# EAGLE board SparkFun_MicroMod_Function_Board_Blues_Notecarrier-Panel (EAGLE 9.6.2), part 1 of 3
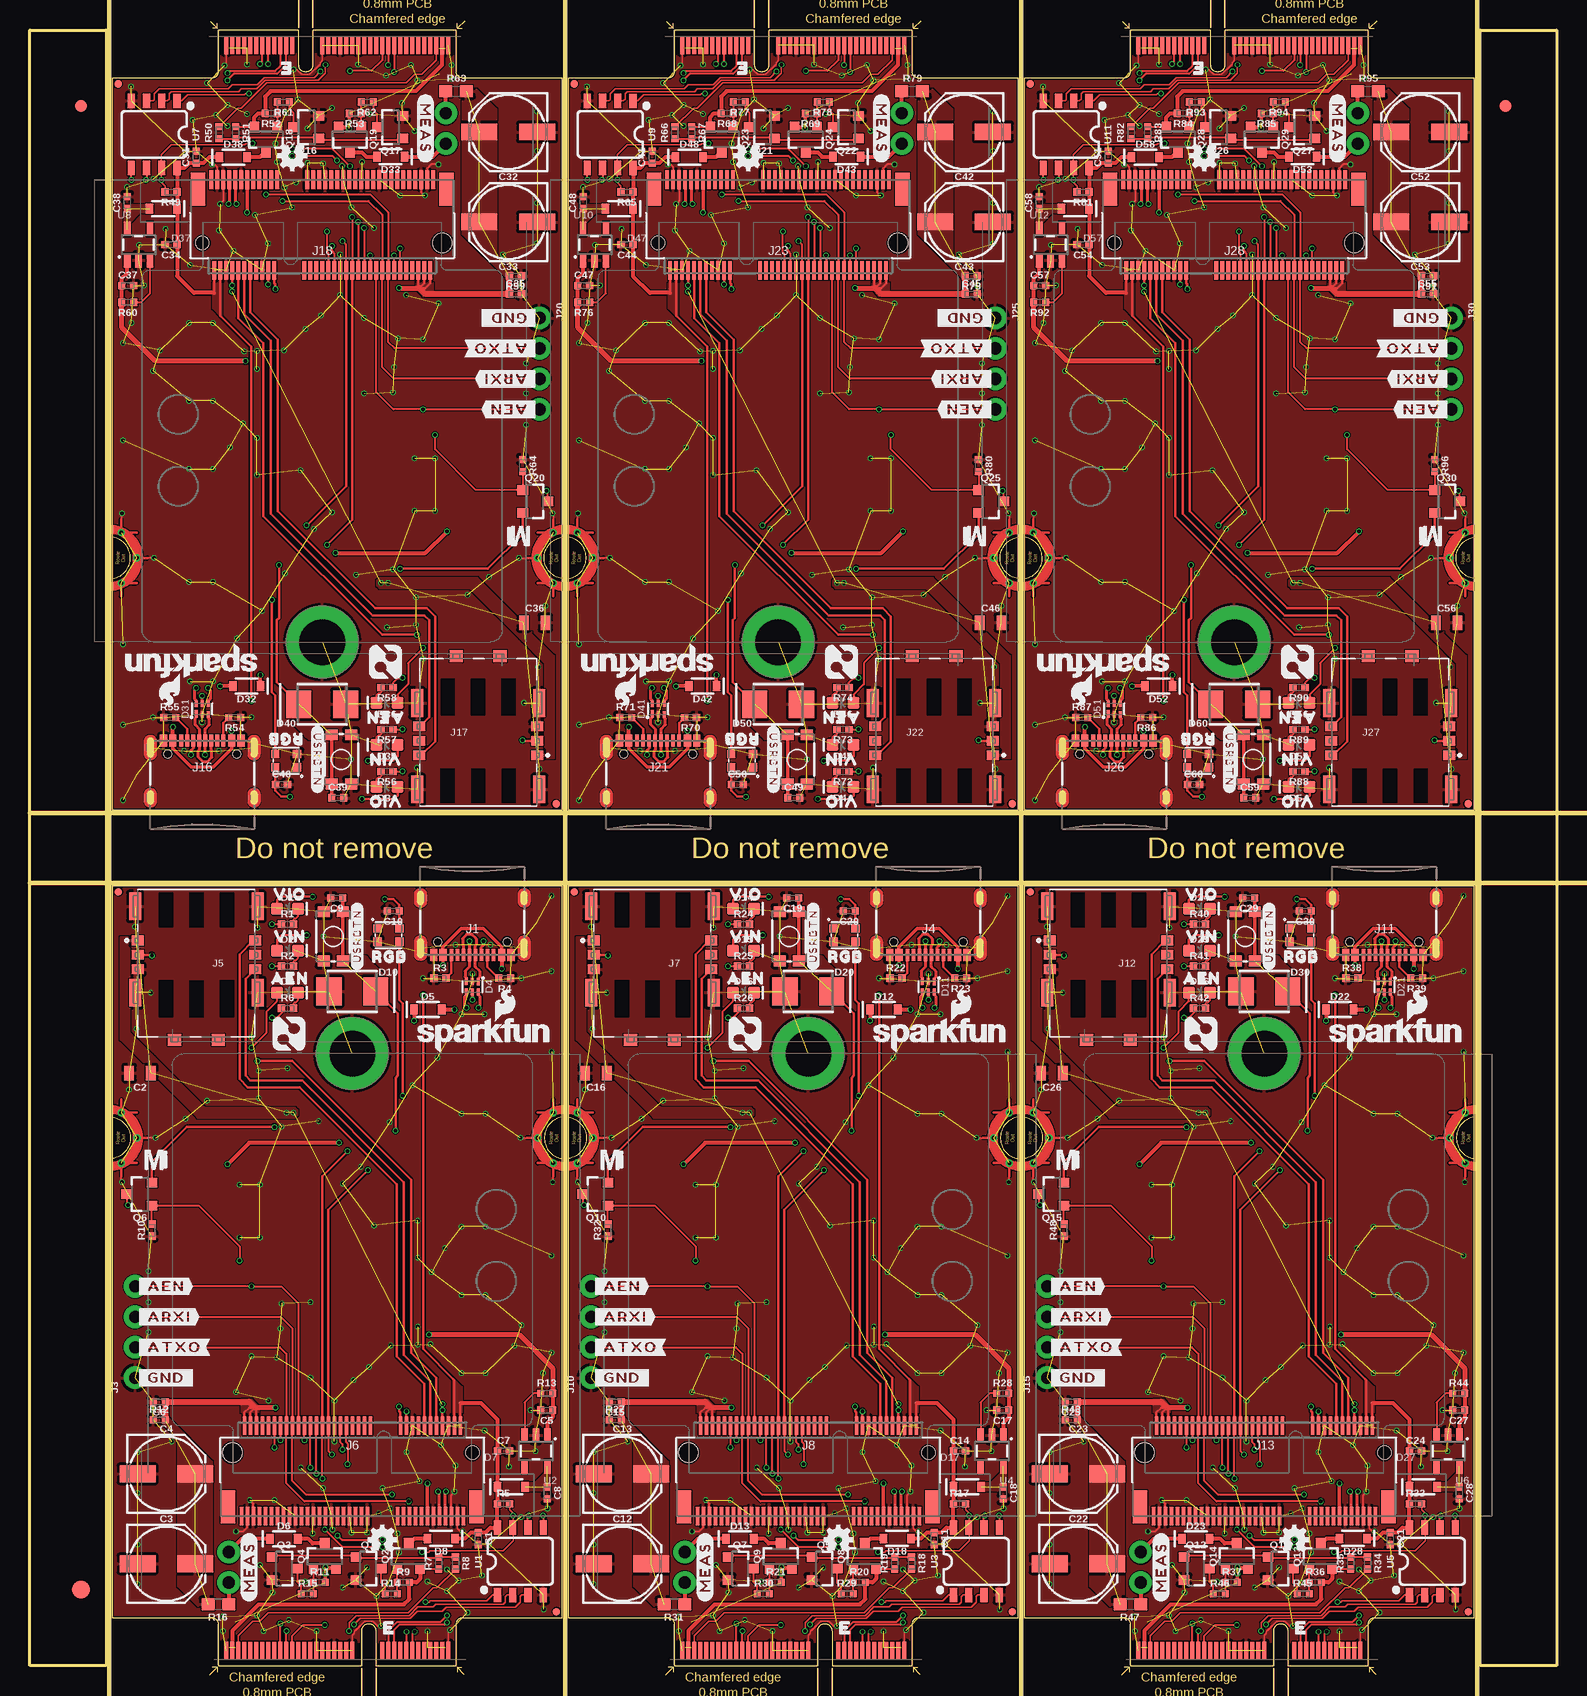
[diagram p0: board, top side]
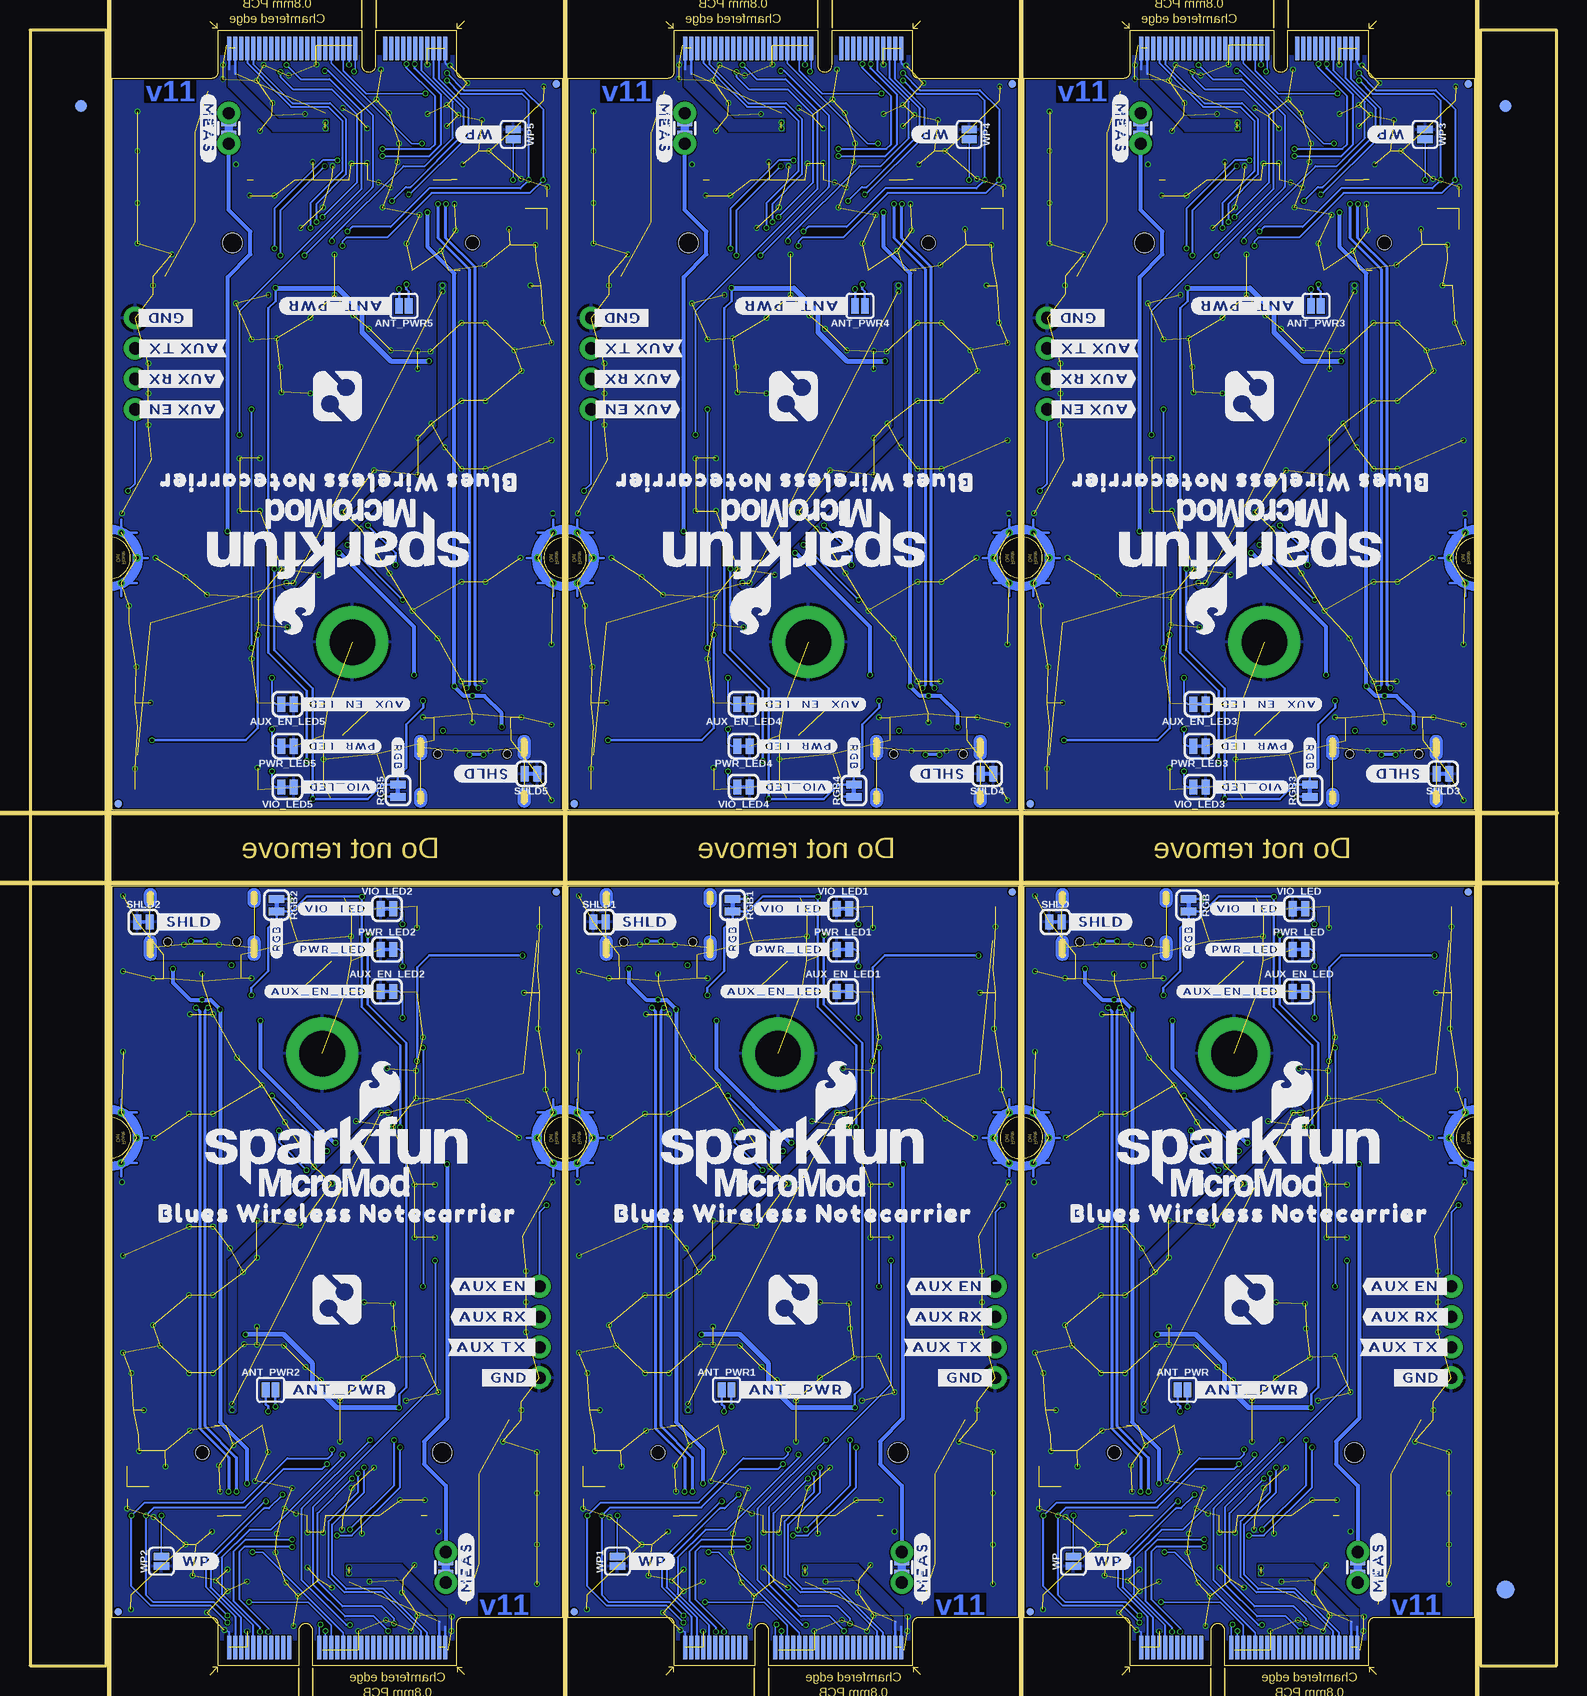
[diagram p1: board, bottom side, seen from below]

Size 127.21 x 136.35 mm. Coordinates in mm from the lower left corner, seen from the top.
Outline: 44.35,4 44.35,65 6.86,65 6.86,4 15.18,4 arc-90 15.68,3.5 15.68,0 27.63,0 27.63,2.9 arc-90 28.23,3.5 28.24,3.5 arc-90 28.83,2.91 28.83,0 35.53,0 35.53,3.51 arc-90 36.03,4 44.35,4
Outline: 82.35,4 82.35,65 44.86,65 44.86,4 53.18,4 arc-90 53.68,3.5 53.68,0 65.63,0 65.63,2.9 arc-90 66.23,3.5 66.24,3.5 arc-90 66.83,2.91 66.83,0 73.53,0 73.53,3.51 arc-90 74.03,4 82.35,4
Outline: 120.35,4 120.35,65 82.86,65 82.86,4 91.18,4 arc-90 91.68,3.5 91.68,0 103.63,0 103.63,2.9 arc-90 104.23,3.5 104.24,3.5 arc-90 104.83,2.91 104.83,0 111.53,0 111.53,3.51 arc-90 112.03,4 120.35,4
Outline: 6.86,132.35 6.86,71.35 44.35,71.35 44.35,132.35 36.03,132.35 arc-90 35.53,132.85 35.53,136.35 23.58,136.35 23.58,133.45 arc-90 22.98,132.85 22.97,132.85 arc-90 22.38,133.44 22.38,136.35 15.68,136.35 15.68,132.84 arc-90 15.18,132.35 6.86,132.35
Outline: 44.86,132.35 44.86,71.35 82.35,71.35 82.35,132.35 74.03,132.35 arc-90 73.53,132.85 73.53,136.35 61.58,136.35 61.58,133.45 arc-90 60.98,132.85 60.97,132.85 arc-90 60.38,133.44 60.38,136.35 53.68,136.35 53.68,132.84 arc-90 53.18,132.35 44.86,132.35
Outline: 82.86,132.35 82.86,71.35 120.35,71.35 120.35,132.35 112.03,132.35 arc-90 111.53,132.85 111.53,136.35 99.58,136.35 99.58,133.45 arc-90 98.98,132.85 98.97,132.85 arc-90 98.38,133.44 98.38,136.35 91.68,136.35 91.68,132.84 arc-90 91.18,132.35 82.86,132.35
Outline: 120.86,136.35 127.21,136.35 127.21,0 120.86,0 120.86,136.35
Outline: 0,136.35 6.35,136.35 6.35,0 0,0 0,136.35
Copper layers (1*16): Top 0.035mm / dielectric 0.8mm / Bottom 0.035mm
Design rules "SparkFun_MicroMod_Function_Board_Blues_Notecarrier": minimum track width 4mil, minimum drill 0.2mm, track to track 4mil, track to pad 4mil, pad to pad 4mil, via to via 4mil, smd to smd 4mil, copper to edge 6mil, drill to drill 6mil, minimum pad ring 3mil, minimum via ring 3mil, stop-mask expansion 2.5mil, vias tented up to drill 25mil, thermal gap 10mil
Net classes: 1 USB_DIFF: width 0.25 mm, clearance 0.2 mm; 4 GND: clearance 0.15 mm to class 0
tRestrict: area 18.3,12.2 to 18.4,12.7; area 35.3,12.3 to 35.4,12.7; area 56.3,12.2 to 56.4,12.7; area 73.3,12.3 to 73.4,12.7; area 94.3,12.2 to 94.4,12.7; area 111.3,12.3 to 111.4,12.7; area 32.8,123.7 to 32.9,124.2; area 15.8,123.7 to 15.9,124.1; area 70.8,123.7 to 70.9,124.2; area 53.8,123.7 to 53.9,124.1; area 108.8,123.7 to 108.9,124.2; area 91.8,123.7 to 91.9,124.1
Milling: 6 lines

## Footprints (pad centres in the part's own frame; a part is rotated, then mirrored left to right if it is on the bottom)
SMT-JUMPER_2_NO_SILK = smd 0.635 x 1.27: 1 -0.406,0; 2 0.406,0
SMT-JUMPER_2_NC_TRACE_SILK = smd 0.66 x 1.27: 1 -0.521,0; 2 0.521,0
0402-TIGHT = smd 0.6 x 0.6: 1 -0.5,0; 2 0.5,0
0805 = smd 0.8 x 1.2: 1 -0.9,0; 2 0.9,0
PANASONIC_D = smd 3 x 1.4: + 2.4,0; - -2.4,0
LED-0603 = smd 1 x 1: A -0.877,0; C 0.877,0
SOT886 = smd 0.61 x 0.25: 1 -0.405,0.5 | smd 0.56 x 0.25: 2 -0.43,0; 3 -0.43,-0.5; 4 0.43,-0.5; 5 0.43,0; 6 0.43,0.5
SOD-323 = smd 0.63 x 0.83: A 1.15,0; C -1.15,0
DO-214AA = smd 2.1 x 2.3: A -1.95,0; C 1.95,0
WS2812-2020 = smd 0.7 x 0.7: DI -0.915,0.55; DO 0.915,-0.55; GND 0.915,0.55; VCC -0.915,-0.55
FIDUCIAL-1X2 = smd 1 x 1: 1 0,0
FIDUCIAL-1.5X3 = smd 1.5 x 1.5: 1 0,0
FIDUCIAL-MICRO = smd 0.635 x 0.635: 1 0,0
STAND-OFF-REFLOW-M2.5 = drill 3.8 pad 6: 1 0,0
USB-C-16P-2LAYER-PADS = smd 0.3 x 1: A5 -1.25,-0.34; A6 -0.25,-0.34; A7 0.25,-0.34; A8 1.25,-0.34; B5 1.75,-0.34; B6 0.75,-0.34; B7 -0.75,-0.34; B8 -1.75,-0.34 | smd 0.6 x 1: GND -3.225,-0.34; GND2 3.225,-0.34; VBUS1 -2.45,-0.34; VBUS2 2.45,-0.34 | drill 0.4 pad 0.6 long: SHLD1 -4.318,-0.915; SHLD2 4.318,-0.915; SHLD3 -4.318,-5.095; SHLD4 4.318,-5.095 | hole 0.65: -2.89,-1.445; 2.89,-1.445
M.2-CARD-E-22_FUNCTION_STANDARD = smd 0.35 x 1.45: 1 9.25,1.275; 3 8.75,1.275; 5 8.25,1.275; 7 7.75,1.275; 9 7.25,1.275; 11 6.75,1.275; 13 6.25,1.275; 15 5.75,1.275; 17 5.25,1.275; 19 4.75,1.275; 21 4.25,1.275; 23 3.75,1.275; 33 1.25,1.275; 35 0.75,1.275; 37 0.25,1.275; 39 -0.25,1.275; 41 -0.75,1.275; 43 -1.25,1.275; 45 -1.75,1.275; 47 -2.25,1.275; 49 -2.75,1.275; 51 -3.25,1.275; 53 -3.75,1.275; 55 -4.25,1.275; 57 -4.75,1.275; 59 -5.25,1.275; 61 -5.75,1.275; 63 -6.25,1.275; 65 -6.75,1.275; 67 -7.25,1.275; 69 -7.75,1.275; 71 -8.25,1.275; 73 -8.75,1.275; 75 -9.25,1.275 | smd 0.35 x 1.95 bottom: 2 9,1.525; 4 8.5,1.525; 6 8,1.525; 8 7.5,1.525; 10 7,1.525; 12 6.5,1.525; 14 6,1.525; 16 5.5,1.525; 18 5,1.525; 20 4.5,1.525; 22 4,1.525; 32 1.5,1.525; 34 1,1.525; 36 0.5,1.525; 38 0,1.525; 40 -0.5,1.525; 42 -1,1.525; 44 -1.5,1.525; 46 -2,1.525; 48 -2.5,1.525; 50 -3,1.525; 52 -3.5,1.525; 54 -4,1.525; 56 -4.5,1.525; 58 -5,1.525; 60 -5.5,1.525; 62 -6,1.525; 64 -6.5,1.525; 66 -7,1.525; 68 -7.5,1.525; 70 -8,1.525; 72 -8.5,1.525; 74 -9,1.525 | drill 0.305 pad 0.61: GND1 -18,41.9; GND2 -16.7,44; GND3 -18,46.1; GND4 18,41.9; GND5 16.7,44; GND6 18,46.1
1X04_NO_SILK = drill 1.016 pad 1.88: 1 0,0; 2 2.54,0; 3 5.08,0; 4 7.62,0
NANO_SIM_MOLEX_104224-0820 = smd 1 x 2.3: G1 -5.1,1.5; G2 -5.1,8.7; G3 5.1,8.7; G4 5.1,1.5 | smd 1.1 x 1: R1 -1.82,12.625; R2 1.82,12.625 | smd 1 x 0.8: S1 4.9,4.35; S2 4.9,5.55; S3 -4.9,4.35; S4 4.9,6.75; S5 -4.9,5.55; S6 -4.9,6.75
M.2-CONNECTOR-E = smd 0.3 x 1.55: 1 9.25,-5.275; 2 9,2.275; 3 8.75,-5.275; 4 8.5,2.275; 5 8.25,-5.275; 6 8,2.275; 7 7.75,-5.275; 8 7.5,2.275; 9 7.25,-5.275; 10 7,2.275; 11 6.75,-5.275; 12 6.5,2.275; 13 6.25,-5.275; 14 6,2.275; 15 5.75,-5.275; 16 5.5,2.275; 17 5.25,-5.275; 18 5,2.275; 19 4.75,-5.275; 20 4.5,2.275; 21 4.25,-5.275; 22 4,2.275; 23 3.75,-5.275; 32 1.5,2.275; 33 1.25,-5.275; 34 1,2.275; 35 0.75,-5.275; 36 0.5,2.275; 37 0.25,-5.275; 38 0,2.275; 39 -0.25,-5.275; 40 -0.5,2.275; 41 -0.75,-5.275; 42 -1,2.275; 43 -1.25,-5.275; 44 -1.5,2.275; 45 -1.75,-5.275; 46 -2,2.275; 47 -2.25,-5.275; 48 -2.5,2.275; 49 -2.75,-5.275; 50 -3,2.275; 51 -3.25,-5.275; 52 -3.5,2.275; 53 -3.75,-5.275; 54 -4,2.275; 55 -4.25,-5.275; 56 -4.5,2.275; 57 -4.75,-5.275; 58 -5,2.275; 59 -5.25,-5.275; 60 -5.5,2.275; 61 -5.75,-5.275; 62 -6,2.275; 63 -6.25,-5.275; 64 -6.5,2.275; 65 -6.75,-5.275; 66 -7,2.275; 67 -7.25,-5.275; 68 -7.5,2.275; 69 -7.75,-5.275; 70 -8,2.275; 71 -8.25,-5.275; 72 -8.5,2.275; 73 -8.75,-5.275; 74 -9,2.275; 75 -9.25,-5.275 | smd 1.2 x 2.75: A1 10.35,-4.5; A2 -10.35,-4.5 | hole 1.1: 10,0 | hole 1.6: -10,0
COMBO-JUMPER_2_NC_TRACE = smd 0.635 x 1.27: 1 -0.508,0; 2 0.508,0 | drill 1.016 pad 1.88: 3 -1.27,0; 4 1.27,0
SOT23-3 = smd 0.8 x 0.9: 1 -0.95,-1; 2 0.95,-1; 3 0,1.1
0603 = smd 1.1 x 1: 1 -0.85,0; 2 0.85,0
TACTILE_SWITCH_SMD_4.6X2.8MM = smd 0.9 x 1: 1 -2.05,-0.8; 2 2.05,-0.8; 3 2.05,0.8; 4 -2.05,0.8
SO08 = smd 0.6 x 1.2: 1 -1.905,-2.8; 2 -0.635,-2.8; 3 0.635,-2.8; 4 1.905,-2.8; 5 1.905,2.8; 6 0.635,2.8; 7 -0.635,2.8; 8 -1.905,2.8
SOT23-5 = smd 0.55 x 1.2: 1 -0.95,-1.3; 2 0,-1.3; 3 0.95,-1.3; 4 0.95,1.3; 5 -0.95,1.3

## Placement (x,y rotation side)
ANT_PWR  JUMPER-SMT_2_NO_SILK  [SMT-JUMPER_2_NO_SILK]  31.16,23 0 bottom
ANT_PWR1  JUMPER-SMT_2_NO_SILK  [SMT-JUMPER_2_NO_SILK]  69.16,23 0 bottom
ANT_PWR2  JUMPER-SMT_2_NO_SILK  [SMT-JUMPER_2_NO_SILK]  107.16,23 0 bottom
ANT_PWR3  JUMPER-SMT_2_NO_SILK  [SMT-JUMPER_2_NO_SILK]  20.05,113.35 180 bottom
ANT_PWR4  JUMPER-SMT_2_NO_SILK  [SMT-JUMPER_2_NO_SILK]  58.05,113.35 180 bottom
ANT_PWR5  JUMPER-SMT_2_NO_SILK  [SMT-JUMPER_2_NO_SILK]  96.05,113.35 180 bottom
AUX_EN_LED  JUMPER-SMT_2_NC_TRACE_SILK  [SMT-JUMPER_2_NC_TRACE_SILK]  21.46,56.2 0 bottom
AUX_EN_LED1  JUMPER-SMT_2_NC_TRACE_SILK  [SMT-JUMPER_2_NC_TRACE_SILK]  59.46,56.2 0 bottom
AUX_EN_LED2  JUMPER-SMT_2_NC_TRACE_SILK  [SMT-JUMPER_2_NC_TRACE_SILK]  97.46,56.2 0 bottom
AUX_EN_LED3  JUMPER-SMT_2_NC_TRACE_SILK  [SMT-JUMPER_2_NC_TRACE_SILK]  29.75,80.15 180 bottom
AUX_EN_LED4  JUMPER-SMT_2_NC_TRACE_SILK  [SMT-JUMPER_2_NC_TRACE_SILK]  67.75,80.15 180 bottom
AUX_EN_LED5  JUMPER-SMT_2_NC_TRACE_SILK  [SMT-JUMPER_2_NC_TRACE_SILK]  105.75,80.15 180 bottom
C1  0.1uF  [0402-TIGHT]  37.36,10.6 270 top
C2  10uF  [0805]  9.16,49.4 180 top
C3  100uF  [PANASONIC_D]  11.36,8.5 0 top
C4  100uF  [PANASONIC_D]  11.36,16 0 top
C5  0.1uF  [0402-TIGHT]  43.06,21.3 180 top
C6  0.1uF  [0402-TIGHT]  10.76,22 180 top
C7  0.1uF  [0402-TIGHT]  39.46,17.9 0 top
C8  1.0uF  [0402-TIGHT]  43.11,14.4 270 top
C9  1.0uF  [0402-TIGHT]  25.56,64 180 top
C10  0.1uF  [0402-TIGHT]  30.26,62.9 180 top
C11  0.1uF  [0402-TIGHT]  75.36,10.6 270 top
C12  100uF  [PANASONIC_D]  49.36,8.5 0 top
C13  100uF  [PANASONIC_D]  49.36,16 0 top
C14  0.1uF  [0402-TIGHT]  77.46,17.9 0 top
C15  0.1uF  [0402-TIGHT]  48.76,22 180 top
C16  10uF  [0805]  47.16,49.4 180 top
C17  0.1uF  [0402-TIGHT]  81.06,21.3 180 top
C18  1.0uF  [0402-TIGHT]  81.11,14.4 270 top
C19  1.0uF  [0402-TIGHT]  63.56,64 180 top
C20  0.1uF  [0402-TIGHT]  68.26,62.9 180 top
C21  0.1uF  [0402-TIGHT]  113.36,10.6 270 top
C22  100uF  [PANASONIC_D]  87.36,8.5 0 top
C23  100uF  [PANASONIC_D]  87.36,16 0 top
C24  0.1uF  [0402-TIGHT]  115.46,17.9 0 top
C25  0.1uF  [0402-TIGHT]  86.76,22 180 top
C26  10uF  [0805]  85.16,49.4 180 top
C27  0.1uF  [0402-TIGHT]  119.06,21.3 180 top
C28  1.0uF  [0402-TIGHT]  119.11,14.4 270 top
C29  1.0uF  [0402-TIGHT]  101.56,64 180 top
C30  0.1uF  [0402-TIGHT]  106.26,62.9 180 top
C31  0.1uF  [0402-TIGHT]  13.85,125.75 90 top
C32  100uF  [PANASONIC_D]  39.85,127.85 180 top
C33  100uF  [PANASONIC_D]  39.85,120.35 180 top
C34  0.1uF  [0402-TIGHT]  11.75,118.45 180 top
C35  0.1uF  [0402-TIGHT]  40.45,114.35 0 top
C36  10uF  [0805]  42.05,86.95 0 top
C37  0.1uF  [0402-TIGHT]  8.15,115.05 0 top
C38  1.0uF  [0402-TIGHT]  8.1,121.95 90 top
C39  1.0uF  [0402-TIGHT]  25.65,72.35 0 top
C40  0.1uF  [0402-TIGHT]  20.95,73.45 0 top
C41  0.1uF  [0402-TIGHT]  51.85,125.75 90 top
C42  100uF  [PANASONIC_D]  77.85,127.85 180 top
C43  100uF  [PANASONIC_D]  77.85,120.35 180 top
C44  0.1uF  [0402-TIGHT]  49.75,118.45 180 top
C45  0.1uF  [0402-TIGHT]  78.45,114.35 0 top
C46  10uF  [0805]  80.05,86.95 0 top
C47  0.1uF  [0402-TIGHT]  46.15,115.05 0 top
C48  1.0uF  [0402-TIGHT]  46.1,121.95 90 top
C49  1.0uF  [0402-TIGHT]  63.65,72.35 0 top
C50  0.1uF  [0402-TIGHT]  58.95,73.45 0 top
C51  0.1uF  [0402-TIGHT]  89.85,125.75 90 top
C52  100uF  [PANASONIC_D]  115.85,127.85 180 top
C53  100uF  [PANASONIC_D]  115.85,120.35 180 top
C54  0.1uF  [0402-TIGHT]  87.75,118.45 180 top
C55  0.1uF  [0402-TIGHT]  116.45,114.35 0 top
C56  10uF  [0805]  118.05,86.95 0 top
C57  0.1uF  [0402-TIGHT]  84.15,115.05 0 top
C58  1.0uF  [0402-TIGHT]  84.1,121.95 90 top
C59  1.0uF  [0402-TIGHT]  101.65,72.35 0 top
C60  0.1uF  [0402-TIGHT]  96.95,73.45 0 top
D1  RED  [LED-0603]  21.46,63.1 0 top
D2  RED  [LED-0603]  21.46,59.6 0 top
D3  BLUE  [LED-0603]  21.46,56.1 0 top
D4  PRTR5V0U2F  [SOT886]  36.86,56.6 270 top
D5  3A/10V/280mV  [SOD-323]  33.16,54.7 0 top
D6  3A/10V/280mV  [SOD-323]  21.16,10.57 0 top
D7  0.5A/40V/420mV  [SOD-323]  40.11,14.9 0 top
D8  0.5A/40V/420mV  [SOD-323]  34.26,10.6 180 top
D9  SMBJP6KE6.8A-TP  [DO-214AA]  26.86,56.2 0 top
D10  WS2812_2020  [WS2812-2020]  29.86,60.9 180 top
D11  PRTR5V0U2F  [SOT886]  74.86,56.6 270 top
D12  3A/10V/280mV  [SOD-323]  71.16,54.7 0 top
D13  3A/10V/280mV  [SOD-323]  59.16,10.57 0 top
D14  RED  [LED-0603]  59.46,63.1 0 top
D15  RED  [LED-0603]  59.46,59.6 0 top
D16  BLUE  [LED-0603]  59.46,56.1 0 top
D17  0.5A/40V/420mV  [SOD-323]  78.11,14.9 0 top
D18  0.5A/40V/420mV  [SOD-323]  72.26,10.6 180 top
D19  SMBJP6KE6.8A-TP  [DO-214AA]  64.86,56.2 0 top
D20  WS2812_2020  [WS2812-2020]  67.86,60.9 180 top
D21  PRTR5V0U2F  [SOT886]  112.86,56.6 270 top
D22  3A/10V/280mV  [SOD-323]  109.16,54.7 0 top
D23  3A/10V/280mV  [SOD-323]  97.16,10.57 0 top
D24  RED  [LED-0603]  97.46,63.1 0 top
D25  RED  [LED-0603]  97.46,59.6 0 top
D26  BLUE  [LED-0603]  97.46,56.1 0 top
D27  0.5A/40V/420mV  [SOD-323]  116.11,14.9 0 top
D28  0.5A/40V/420mV  [SOD-323]  110.26,10.6 180 top
D29  SMBJP6KE6.8A-TP  [DO-214AA]  102.86,56.2 0 top
D30  WS2812_2020  [WS2812-2020]  105.86,60.9 180 top
D31  PRTR5V0U2F  [SOT886]  14.35,79.75 90 top
D32  3A/10V/280mV  [SOD-323]  18.05,81.65 180 top
D33  3A/10V/280mV  [SOD-323]  30.05,125.78 180 top
D34  RED  [LED-0603]  29.75,73.25 180 top
D35  RED  [LED-0603]  29.75,76.75 180 top
D36  BLUE  [LED-0603]  29.75,80.25 180 top
D37  0.5A/40V/420mV  [SOD-323]  11.1,121.45 180 top
D38  0.5A/40V/420mV  [SOD-323]  16.95,125.75 0 top
D39  SMBJP6KE6.8A-TP  [DO-214AA]  24.35,80.15 180 top
D40  WS2812_2020  [WS2812-2020]  21.35,75.45 0 top
D41  PRTR5V0U2F  [SOT886]  52.35,79.75 90 top
D42  3A/10V/280mV  [SOD-323]  56.05,81.65 180 top
D43  3A/10V/280mV  [SOD-323]  68.05,125.78 180 top
D44  RED  [LED-0603]  67.75,73.25 180 top
D45  RED  [LED-0603]  67.75,76.75 180 top
D46  BLUE  [LED-0603]  67.75,80.25 180 top
D47  0.5A/40V/420mV  [SOD-323]  49.1,121.45 180 top
D48  0.5A/40V/420mV  [SOD-323]  54.95,125.75 0 top
D49  SMBJP6KE6.8A-TP  [DO-214AA]  62.35,80.15 180 top
D50  WS2812_2020  [WS2812-2020]  59.35,75.45 0 top
D51  PRTR5V0U2F  [SOT886]  90.35,79.75 90 top
D52  3A/10V/280mV  [SOD-323]  94.05,81.65 180 top
D53  3A/10V/280mV  [SOD-323]  106.05,125.78 180 top
D54  RED  [LED-0603]  105.75,73.25 180 top
D55  RED  [LED-0603]  105.75,76.75 180 top
D56  BLUE  [LED-0603]  105.75,80.25 180 top
D57  0.5A/40V/420mV  [SOD-323]  87.1,121.45 180 top
D58  0.5A/40V/420mV  [SOD-323]  92.95,125.75 0 top
D59  SMBJP6KE6.8A-TP  [DO-214AA]  100.35,80.15 180 top
D60  WS2812_2020  [WS2812-2020]  97.35,75.45 0 top
E$1  [FIDUCIAL-1X2]  4.23,130 0 top
E$2  [FIDUCIAL-1X2]  4.23,130 0 bottom
E$3  [FIDUCIAL-1X2]  122.98,130 0 top
E$4  [FIDUCIAL-1X2]  122.98,130 0 bottom
E$5  [FIDUCIAL-1.5X3]  4.23,6.35 0 top
E$6  [FIDUCIAL-1.5X3]  4.23,6.35 0 bottom
FD1  FIDUCIALUFIDUCIAL  [FIDUCIAL-MICRO]  7.36,64.5 0 top
FD2  FIDUCIALUFIDUCIAL  [FIDUCIAL-MICRO]  7.36,64.5 0 bottom
FD3  FIDUCIALUFIDUCIAL  [FIDUCIAL-MICRO]  43.86,4.5 0 bottom
FD4  FIDUCIALUFIDUCIAL  [FIDUCIAL-MICRO]  43.86,4.5 0 top
FD5  FIDUCIALUFIDUCIAL  [FIDUCIAL-MICRO]  81.86,4.5 0 top
FD6  FIDUCIALUFIDUCIAL  [FIDUCIAL-MICRO]  81.86,4.5 0 bottom
FD7  FIDUCIALUFIDUCIAL  [FIDUCIAL-MICRO]  45.36,64.5 0 top
FD8  FIDUCIALUFIDUCIAL  [FIDUCIAL-MICRO]  45.36,64.5 0 bottom
FD9  FIDUCIALUFIDUCIAL  [FIDUCIAL-MICRO]  119.86,4.5 0 top
FD10  FIDUCIALUFIDUCIAL  [FIDUCIAL-MICRO]  119.86,4.5 0 bottom
FD11  FIDUCIALUFIDUCIAL  [FIDUCIAL-MICRO]  83.36,64.5 0 top
FD12  FIDUCIALUFIDUCIAL  [FIDUCIAL-MICRO]  83.36,64.5 0 bottom
FD13  FIDUCIALUFIDUCIAL  [FIDUCIAL-MICRO]  7.35,131.85 180 top
FD14  FIDUCIALUFIDUCIAL  [FIDUCIAL-MICRO]  7.35,131.85 180 bottom
FD15  FIDUCIALUFIDUCIAL  [FIDUCIAL-MICRO]  43.85,71.85 180 top
FD16  FIDUCIALUFIDUCIAL  [FIDUCIAL-MICRO]  43.85,71.85 180 bottom
FD17  FIDUCIALUFIDUCIAL  [FIDUCIAL-MICRO]  45.35,131.85 180 top
FD18  FIDUCIALUFIDUCIAL  [FIDUCIAL-MICRO]  45.35,131.85 180 bottom
FD19  FIDUCIALUFIDUCIAL  [FIDUCIAL-MICRO]  81.85,71.85 180 top
FD20  FIDUCIALUFIDUCIAL  [FIDUCIAL-MICRO]  81.85,71.85 180 bottom
FD21  FIDUCIALUFIDUCIAL  [FIDUCIAL-MICRO]  83.35,131.85 180 top
FD22  FIDUCIALUFIDUCIAL  [FIDUCIAL-MICRO]  83.35,131.85 180 bottom
FD23  FIDUCIALUFIDUCIAL  [FIDUCIAL-MICRO]  119.85,71.85 180 top
FD24  FIDUCIALUFIDUCIAL  [FIDUCIAL-MICRO]  119.85,71.85 180 bottom
H1  STAND-OFF-REFLOW-M2.5_2.5MM_TALL  [STAND-OFF-REFLOW-M2.5]  26.86,51.03 0 top
H2  STAND-OFF-REFLOW-M2.5_2.5MM_TALL  [STAND-OFF-REFLOW-M2.5]  64.86,51.03 0 top
H3  STAND-OFF-REFLOW-M2.5_2.5MM_TALL  [STAND-OFF-REFLOW-M2.5]  102.86,51.03 0 top
H4  STAND-OFF-REFLOW-M2.5_2.5MM_TALL  [STAND-OFF-REFLOW-M2.5]  24.35,85.32 180 top
H5  STAND-OFF-REFLOW-M2.5_2.5MM_TALL  [STAND-OFF-REFLOW-M2.5]  62.35,85.32 180 top
H6  STAND-OFF-REFLOW-M2.5_2.5MM_TALL  [STAND-OFF-REFLOW-M2.5]  100.35,85.32 180 top
J1  [USB-C-16P-2LAYER-PADS]  36.86,58.9 180 top
J2  MICROMOD_FUNCTION_STANDARD  [M.2-CARD-E-22_FUNCTION_STANDARD]  25.61,0 0 top
J3  [1X04_NO_SILK]  8.76,24 90 top
J4  [USB-C-16P-2LAYER-PADS]  74.86,58.9 180 top
J5  [NANO_SIM_MOLEX_104224-0820]  13.86,64.8 180 top
J6  NOTECARD  [M.2-CONNECTOR-E]  26.86,17.75 0 top
J7  [NANO_SIM_MOLEX_104224-0820]  51.86,64.8 180 top
J8  NOTECARD  [M.2-CONNECTOR-E]  64.86,17.75 0 top
J9  MICROMOD_FUNCTION_STANDARD  [M.2-CARD-E-22_FUNCTION_STANDARD]  63.61,0 0 top
J10  [1X04_NO_SILK]  46.76,24 90 top
J11  [USB-C-16P-2LAYER-PADS]  112.86,58.9 180 top
J12  [NANO_SIM_MOLEX_104224-0820]  89.86,64.8 180 top
J13  NOTECARD  [M.2-CONNECTOR-E]  102.86,17.75 0 top
J14  MICROMOD_FUNCTION_STANDARD  [M.2-CARD-E-22_FUNCTION_STANDARD]  101.61,0 0 top
J15  [1X04_NO_SILK]  84.76,24 90 top
J16  [USB-C-16P-2LAYER-PADS]  14.35,77.45 0 top
J17  [NANO_SIM_MOLEX_104224-0820]  37.35,71.55 0 top
J18  NOTECARD  [M.2-CONNECTOR-E]  24.35,118.6 180 top
J19  MICROMOD_FUNCTION_STANDARD  [M.2-CARD-E-22_FUNCTION_STANDARD]  25.6,136.35 180 top
J20  [1X04_NO_SILK]  42.45,112.35 270 top
J21  [USB-C-16P-2LAYER-PADS]  52.35,77.45 0 top
J22  [NANO_SIM_MOLEX_104224-0820]  75.35,71.55 0 top
J23  NOTECARD  [M.2-CONNECTOR-E]  62.35,118.6 180 top
J24  MICROMOD_FUNCTION_STANDARD  [M.2-CARD-E-22_FUNCTION_STANDARD]  63.6,136.35 180 top
J25  [1X04_NO_SILK]  80.45,112.35 270 top
J26  [USB-C-16P-2LAYER-PADS]  90.35,77.45 0 top
J27  [NANO_SIM_MOLEX_104224-0820]  113.35,71.55 0 top
J28  NOTECARD  [M.2-CONNECTOR-E]  100.35,118.6 180 top
J29  MICROMOD_FUNCTION_STANDARD  [M.2-CARD-E-22_FUNCTION_STANDARD]  101.6,136.35 180 top
J30  [1X04_NO_SILK]  118.45,112.35 270 top
LOGO1  SFE_LOGO_NAME_FLAME.1_INCH  [SFE_LOGO_NAME_FLAME_.1]  37.86,52.6 0 top
LOGO2  OSHW-LOGOMINI  [OSHW-LOGO-MINI]  67.36,10.5 0 top
LOGO3  OSHW-LOGOMINI  [OSHW-LOGO-MINI]  29.36,10.5 0 top
LOGO4  SFE_LOGO_NAME_FLAME.1_INCH  [SFE_LOGO_NAME_FLAME_.1]  75.86,52.6 0 top
LOGO5  OSHW-LOGOMINI  [OSHW-LOGO-MINI]  105.36,10.5 0 top
LOGO6  SFE_LOGO_NAME_FLAME.1_INCH  [SFE_LOGO_NAME_FLAME_.1]  113.86,52.6 0 top
LOGO7  OSHW-LOGOMINI  [OSHW-LOGO-MINI]  21.85,125.85 180 top
LOGO8  SFE_LOGO_NAME_FLAME.1_INCH  [SFE_LOGO_NAME_FLAME_.1]  13.35,83.75 180 top
LOGO9  OSHW-LOGOMINI  [OSHW-LOGO-MINI]  59.85,125.85 180 top
LOGO10  SFE_LOGO_NAME_FLAME.1_INCH  [SFE_LOGO_NAME_FLAME_.1]  51.35,83.75 180 top
LOGO11  OSHW-LOGOMINI  [OSHW-LOGO-MINI]  97.85,125.85 180 top
LOGO12  SFE_LOGO_NAME_FLAME.1_INCH  [SFE_LOGO_NAME_FLAME_.1]  89.35,83.75 180 top
MEAS  JUMPER-COMBO_2_NC_TRACE  [COMBO-JUMPER_2_NC_TRACE]  16.56,8.2 270 bottom
MEAS1  JUMPER-COMBO_2_NC_TRACE  [COMBO-JUMPER_2_NC_TRACE]  54.56,8.2 270 bottom
MEAS2  JUMPER-COMBO_2_NC_TRACE  [COMBO-JUMPER_2_NC_TRACE]  92.56,8.2 270 bottom
MEAS3  JUMPER-COMBO_2_NC_TRACE  [COMBO-JUMPER_2_NC_TRACE]  34.65,128.15 90 bottom
MEAS4  JUMPER-COMBO_2_NC_TRACE  [COMBO-JUMPER_2_NC_TRACE]  72.65,128.15 90 bottom
MEAS5  JUMPER-COMBO_2_NC_TRACE  [COMBO-JUMPER_2_NC_TRACE]  110.65,128.15 90 bottom
PWR_LED  JUMPER-SMT_2_NC_TRACE_SILK  [SMT-JUMPER_2_NC_TRACE_SILK]  21.46,59.7 0 bottom
PWR_LED1  JUMPER-SMT_2_NC_TRACE_SILK  [SMT-JUMPER_2_NC_TRACE_SILK]  59.46,59.7 0 bottom
PWR_LED2  JUMPER-SMT_2_NC_TRACE_SILK  [SMT-JUMPER_2_NC_TRACE_SILK]  97.46,59.7 0 bottom
PWR_LED3  JUMPER-SMT_2_NC_TRACE_SILK  [SMT-JUMPER_2_NC_TRACE_SILK]  29.75,76.65 180 bottom
PWR_LED4  JUMPER-SMT_2_NC_TRACE_SILK  [SMT-JUMPER_2_NC_TRACE_SILK]  67.75,76.65 180 bottom
PWR_LED5  JUMPER-SMT_2_NC_TRACE_SILK  [SMT-JUMPER_2_NC_TRACE_SILK]  105.75,76.65 180 bottom
Q1  220mA/50V/3.5Ω  [SOT23-3]  28.16,8.1 270 top
Q2  20V/4.2A/52mΩ/1.4W  [SOT23-3]  31.56,9.1 0 top
Q3  220mA/50V/3.5Ω  [SOT23-3]  21.16,8.1 270 top
Q4  20V/4.2A/52mΩ/1.4W  [SOT23-3]  24.56,9.1 0 top
Q5  220mA/50V/3.5Ω  [SOT23-3]  66.16,8.1 270 top
Q6  20V/4.2A/52mΩ/1.4W  [SOT23-3]  9.16,39.3 90 top
Q7  220mA/50V/3.5Ω  [SOT23-3]  59.16,8.1 270 top
Q8  20V/4.2A/52mΩ/1.4W  [SOT23-3]  69.56,9.1 0 top
Q9  20V/4.2A/52mΩ/1.4W  [SOT23-3]  62.56,9.1 0 top
Q10  20V/4.2A/52mΩ/1.4W  [SOT23-3]  47.16,39.3 90 top
Q11  220mA/50V/3.5Ω  [SOT23-3]  104.16,8.1 270 top
Q12  220mA/50V/3.5Ω  [SOT23-3]  97.16,8.1 270 top
Q13  20V/4.2A/52mΩ/1.4W  [SOT23-3]  107.56,9.1 0 top
Q14  20V/4.2A/52mΩ/1.4W  [SOT23-3]  100.56,9.1 0 top
Q15  20V/4.2A/52mΩ/1.4W  [SOT23-3]  85.16,39.3 90 top
Q16  220mA/50V/3.5Ω  [SOT23-3]  23.05,128.25 90 top
Q17  220mA/50V/3.5Ω  [SOT23-3]  30.05,128.25 90 top
Q18  20V/4.2A/52mΩ/1.4W  [SOT23-3]  19.65,127.25 180 top
Q19  20V/4.2A/52mΩ/1.4W  [SOT23-3]  26.65,127.25 180 top
Q20  20V/4.2A/52mΩ/1.4W  [SOT23-3]  42.05,97.05 270 top
Q21  220mA/50V/3.5Ω  [SOT23-3]  61.05,128.25 90 top
Q22  220mA/50V/3.5Ω  [SOT23-3]  68.05,128.25 90 top
Q23  20V/4.2A/52mΩ/1.4W  [SOT23-3]  57.65,127.25 180 top
Q24  20V/4.2A/52mΩ/1.4W  [SOT23-3]  64.65,127.25 180 top
Q25  20V/4.2A/52mΩ/1.4W  [SOT23-3]  80.05,97.05 270 top
Q26  220mA/50V/3.5Ω  [SOT23-3]  99.05,128.25 90 top
Q27  220mA/50V/3.5Ω  [SOT23-3]  106.05,128.25 90 top
Q28  20V/4.2A/52mΩ/1.4W  [SOT23-3]  95.65,127.25 180 top
Q29  20V/4.2A/52mΩ/1.4W  [SOT23-3]  102.65,127.25 180 top
Q30  20V/4.2A/52mΩ/1.4W  [SOT23-3]  118.05,97.05 270 top
R1  1k  [0402-TIGHT]  21.46,61.8 0 top
R2  1k  [0402-TIGHT]  21.46,58.3 0 top
R3  5.1k  [0402-TIGHT]  34.16,57.3 0 top
R4  5.1k  [0402-TIGHT]  39.56,57.3 180 top
R5  10k  [0402-TIGHT]  39.46,13.5 0 top
R6  2.2k  [0402-TIGHT]  21.46,54.8 0 top
R7  10k  [0402-TIGHT]  34.06,8.55 90 top
R8  560Ω  [0402-TIGHT]  35.46,8.55 270 top
R9  10k  [0402-TIGHT]  31.11,6.95 0 top
R10  10k  [0402-TIGHT]  10.16,36.3 90 top
R11  10k  [0402-TIGHT]  24.11,6.95 0 top
R12  2.2M  [0402-TIGHT]  10.76,20.5 0 top
R13  10k  [0402-TIGHT]  43.06,22.7 0 top
R14  100  [0402-TIGHT]  30.11,6 0 top
R15  100  [0402-TIGHT]  23.11,6 0 top
R16  1  [0603]  15.71,5.1 180 top
R17  10k  [0402-TIGHT]  77.46,13.5 0 top
R18  560Ω  [0402-TIGHT]  73.46,8.55 270 top
R19  10k  [0402-TIGHT]  72.06,8.55 90 top
R20  10k  [0402-TIGHT]  69.11,6.95 0 top
R21  10k  [0402-TIGHT]  62.11,6.95 0 top
R22  5.1k  [0402-TIGHT]  72.16,57.3 0 top
R23  5.1k  [0402-TIGHT]  77.56,57.3 180 top
R24  1k  [0402-TIGHT]  59.46,61.8 0 top
R25  1k  [0402-TIGHT]  59.46,58.3 0 top
R26  2.2k  [0402-TIGHT]  59.46,54.8 0 top
R27  2.2M  [0402-TIGHT]  48.76,20.5 0 top
R28  10k  [0402-TIGHT]  81.06,22.7 0 top
R29  100  [0402-TIGHT]  68.11,6 0 top
R30  100  [0402-TIGHT]  61.11,6 0 top
R31  1  [0603]  53.71,5.1 180 top
R32  10k  [0402-TIGHT]  48.16,36.3 90 top
R33  10k  [0402-TIGHT]  115.46,13.5 0 top
R34  560Ω  [0402-TIGHT]  111.46,8.55 270 top
R35  10k  [0402-TIGHT]  110.06,8.55 90 top
R36  10k  [0402-TIGHT]  107.11,6.95 0 top
R37  10k  [0402-TIGHT]  100.11,6.95 0 top
R38  5.1k  [0402-TIGHT]  110.16,57.3 0 top
R39  5.1k  [0402-TIGHT]  115.56,57.3 180 top
R40  1k  [0402-TIGHT]  97.46,61.8 0 top
R41  1k  [0402-TIGHT]  97.46,58.3 0 top
R42  2.2k  [0402-TIGHT]  97.46,54.8 0 top
R43  2.2M  [0402-TIGHT]  86.76,20.5 0 top
R44  10k  [0402-TIGHT]  119.06,22.7 0 top
R45  100  [0402-TIGHT]  106.11,6 0 top
R46  100  [0402-TIGHT]  99.11,6 0 top
R47  1  [0603]  91.71,5.1 180 top
R48  10k  [0402-TIGHT]  86.16,36.3 90 top
R49  10k  [0402-TIGHT]  11.75,122.85 180 top
R50  560Ω  [0402-TIGHT]  15.75,127.8 90 top
R51  10k  [0402-TIGHT]  17.15,127.8 270 top
R52  10k  [0402-TIGHT]  20.1,129.4 180 top
R53  10k  [0402-TIGHT]  27.1,129.4 180 top
R54  5.1k  [0402-TIGHT]  17.05,79.05 180 top
R55  5.1k  [0402-TIGHT]  11.65,79.05 0 top
R56  1k  [0402-TIGHT]  29.75,74.55 180 top
R57  1k  [0402-TIGHT]  29.75,78.05 180 top
R58  2.2k  [0402-TIGHT]  29.75,81.55 180 top
R59  2.2M  [0402-TIGHT]  40.45,115.85 180 top
R60  10k  [0402-TIGHT]  8.15,113.65 180 top
R61  100  [0402-TIGHT]  21.1,130.35 180 top
R62  100  [0402-TIGHT]  28.1,130.35 180 top
R63  1  [0603]  35.5,131.25 0 top
R64  10k  [0402-TIGHT]  41.05,100.05 270 top
R65  10k  [0402-TIGHT]  49.75,122.85 180 top
R66  560Ω  [0402-TIGHT]  53.75,127.8 90 top
R67  10k  [0402-TIGHT]  55.15,127.8 270 top
R68  10k  [0402-TIGHT]  58.1,129.4 180 top
R69  10k  [0402-TIGHT]  65.1,129.4 180 top
R70  5.1k  [0402-TIGHT]  55.05,79.05 180 top
R71  5.1k  [0402-TIGHT]  49.65,79.05 0 top
R72  1k  [0402-TIGHT]  67.75,74.55 180 top
R73  1k  [0402-TIGHT]  67.75,78.05 180 top
R74  2.2k  [0402-TIGHT]  67.75,81.55 180 top
R75  2.2M  [0402-TIGHT]  78.45,115.85 180 top
R76  10k  [0402-TIGHT]  46.15,113.65 180 top
R77  100  [0402-TIGHT]  59.1,130.35 180 top
R78  100  [0402-TIGHT]  66.1,130.35 180 top
R79  1  [0603]  73.5,131.25 0 top
R80  10k  [0402-TIGHT]  79.05,100.05 270 top
R81  10k  [0402-TIGHT]  87.75,122.85 180 top
R82  560Ω  [0402-TIGHT]  91.75,127.8 90 top
R83  10k  [0402-TIGHT]  93.15,127.8 270 top
R84  10k  [0402-TIGHT]  96.1,129.4 180 top
R85  10k  [0402-TIGHT]  103.1,129.4 180 top
R86  5.1k  [0402-TIGHT]  93.05,79.05 180 top
R87  5.1k  [0402-TIGHT]  87.65,79.05 0 top
R88  1k  [0402-TIGHT]  105.75,74.55 180 top
R89  1k  [0402-TIGHT]  105.75,78.05 180 top
R90  2.2k  [0402-TIGHT]  105.75,81.55 180 top
R91  2.2M  [0402-TIGHT]  116.45,115.85 180 top
R92  10k  [0402-TIGHT]  84.15,113.65 180 top
R93  100  [0402-TIGHT]  97.1,130.35 180 top
R94  100  [0402-TIGHT]  104.1,130.35 180 top
R95  1  [0603]  111.5,131.25 0 top
R96  10k  [0402-TIGHT]  117.05,100.05 270 top
RGB  JUMPER-SMT_2_NC_TRACE_SILK  [SMT-JUMPER_2_NC_TRACE_SILK]  30.66,63.4 270 bottom
RGB1  JUMPER-SMT_2_NC_TRACE_SILK  [SMT-JUMPER_2_NC_TRACE_SILK]  68.66,63.4 270 bottom
RGB2  JUMPER-SMT_2_NC_TRACE_SILK  [SMT-JUMPER_2_NC_TRACE_SILK]  106.66,63.4 270 bottom
RGB3  JUMPER-SMT_2_NC_TRACE_SILK  [SMT-JUMPER_2_NC_TRACE_SILK]  20.55,72.95 90 bottom
RGB4  JUMPER-SMT_2_NC_TRACE_SILK  [SMT-JUMPER_2_NC_TRACE_SILK]  58.55,72.95 90 bottom
RGB5  JUMPER-SMT_2_NC_TRACE_SILK  [SMT-JUMPER_2_NC_TRACE_SILK]  96.55,72.95 90 bottom
S1  MOMENTARY-SWITCH-SPST-SMD-4.6X2.8MM  [TACTILE_SWITCH_SMD_4.6X2.8MM]  25.26,60.8 270 top
S2  MOMENTARY-SWITCH-SPST-SMD-4.6X2.8MM  [TACTILE_SWITCH_SMD_4.6X2.8MM]  63.26,60.8 270 top
S3  MOMENTARY-SWITCH-SPST-SMD-4.6X2.8MM  [TACTILE_SWITCH_SMD_4.6X2.8MM]  101.26,60.8 270 top
S4  MOMENTARY-SWITCH-SPST-SMD-4.6X2.8MM  [TACTILE_SWITCH_SMD_4.6X2.8MM]  25.95,75.55 90 top
S5  MOMENTARY-SWITCH-SPST-SMD-4.6X2.8MM  [TACTILE_SWITCH_SMD_4.6X2.8MM]  63.95,75.55 90 top
S6  MOMENTARY-SWITCH-SPST-SMD-4.6X2.8MM  [TACTILE_SWITCH_SMD_4.6X2.8MM]  101.95,75.55 90 top
SHLD  JUMPER-SMT_2_NC_TRACE_SILK  [SMT-JUMPER_2_NC_TRACE_SILK]  41.76,62 0 bottom
SHLD1  JUMPER-SMT_2_NC_TRACE_SILK  [SMT-JUMPER_2_NC_TRACE_SILK]  79.76,62 0 bottom
SHLD2  JUMPER-SMT_2_NC_TRACE_SILK  [SMT-JUMPER_2_NC_TRACE_SILK]  117.76,62 0 bottom
SHLD3  JUMPER-SMT_2_NC_TRACE_SILK  [SMT-JUMPER_2_NC_TRACE_SILK]  9.45,74.35 180 bottom
SHLD4  JUMPER-SMT_2_NC_TRACE_SILK  [SMT-JUMPER_2_NC_TRACE_SILK]  47.45,74.35 180 bottom
SHLD5  JUMPER-SMT_2_NC_TRACE_SILK  [SMT-JUMPER_2_NC_TRACE_SILK]  85.45,74.35 180 bottom
U1  EEPROM  [SO08]  40.86,8.7 0 top
U2  TCR2EF33  [SOT23-5]  42.16,17.9 180 top
U3  EEPROM  [SO08]  78.86,8.7 0 top
U4  TCR2EF33  [SOT23-5]  80.16,17.9 180 top
U5  EEPROM  [SO08]  116.86,8.7 0 top
U6  TCR2EF33  [SOT23-5]  118.16,17.9 180 top
U7  EEPROM  [SO08]  10.35,127.65 180 top
U8  TCR2EF33  [SOT23-5]  9.05,118.45 0 top
U9  EEPROM  [SO08]  48.35,127.65 180 top
U10  TCR2EF33  [SOT23-5]  47.05,118.45 0 top
U11  EEPROM  [SO08]  86.35,127.65 180 top
U12  TCR2EF33  [SOT23-5]  85.05,118.45 0 top
U$1  [AEN1]  21.66,57.3 0 top
U$2  [VIN3]  21.66,60.8 0 top
U$3  [VIO4]  21.66,64.3 0 top
U$4  [#VIO_LED_#21]  28.86,63.1 0 bottom
U$5  [#_ARXI#0]  8.76,29.08 0 top
U$6  [SFE_LOGO_FLAME_STOP_.1]  10.46,46.5 0 top
U$7  [#_GND_#0]  8.76,24 0 top
U$8  [#_WP#2]  39.56,8.7 0 bottom
U$9  [BLUES_WIRELESS_NOTECARRIER0]  25.61,37.7 0 bottom
U$10  [NOTEHUB_BLUES#SVG7]  27.61,32.5 0 bottom
U$11  [#_ATXO#0]  8.76,26.54 0 top
U$12  [#AUX_TX_#0]  16.36,26.54 0 bottom
U$13  [#_AEN#0]  8.76,31.62 0 top
U$14  [SFE_LOGO_NAME_FLAME_.2]  25.61,43 0 bottom
U$15  [#AUX_RX_#0]  16.16,29.08 0 bottom
U$16  [#MEAS#4]  14.86,8.2 90 bottom
U$17  [#MEAS#4]  18.26,8.2 90 top
U$18  [#_ANT_PWR#5]  25.56,23 0 bottom
U$19  [#AUX_EN_LED_#20]  31.66,56.2 0 bottom
U$20  [#_SHLD#23]  40.86,62 0 bottom
U$21  [#PWR_LED_#17]  29.26,59.7 0 bottom
U$22  [#_GND_#24]  13.86,24 0 bottom
U$23  [NOTEHUB_BLUES#SVG5]  20.26,54 0 top
U$24  [#RGB_#0]  30.66,59 90 bottom
U$25  [#USRBTN#0]  27.26,60.8 90 top
U$26  [RGB0]  29.96,59.1 0 top
U$27  [AEN1]  59.66,57.3 0 top
U$28  [VIN3]  59.66,60.8 0 top
U$29  [MICROMOD_MI_LOGO_.35]  10.46,42.2 0 top
U$30  [#AUX_EN_#0]  16.16,31.62 0 bottom
U$31  [MICROMOD_LOGO_.5]  25.86,40.3 0 bottom
U$32  [VIO4]  59.66,64.3 0 top
U$33  [SFE_LOGO_FLAME_STOP_.1]  48.46,46.5 0 top
U$34  [#_GND_#0]  46.76,24 0 top
U$35  [SFE_LOGO_NAME_FLAME_.2]  63.61,43 0 bottom
U$36  [#_WP#2]  77.56,8.7 0 bottom
U$37  [#MEAS#4]  52.86,8.2 90 bottom
U$38  [#MEAS#4]  56.26,8.2 90 top
U$39  [#_ANT_PWR#5]  63.56,23 0 bottom
U$40  [#PWR_LED_#17]  67.26,59.7 0 bottom
U$41  [#AUX_EN_LED_#20]  69.66,56.2 0 bottom
U$42  [#VIO_LED_#21]  66.86,63.1 0 bottom
U$43  [#_SHLD#23]  78.86,62 0 bottom
U$44  [#_GND_#24]  51.86,24 0 bottom
U$45  [MICROMOD_MI_LOGO_.35]  48.46,42.2 0 top
U$46  [#AUX_EN_#0]  54.16,31.62 0 bottom
U$47  [NOTEHUB_BLUES#SVG5]  58.26,54 0 top
U$48  [MICROMOD_LOGO_.5]  63.86,40.3 0 bottom
U$49  [BLUES_WIRELESS_NOTECARRIER0]  63.61,37.7 0 bottom
U$50  [NOTEHUB_BLUES#SVG7]  65.61,32.5 0 bottom
U$51  [#AUX_TX_#0]  54.36,26.54 0 bottom
U$52  [#AUX_RX_#0]  54.16,29.08 0 bottom
U$53  [#_ARXI#0]  46.76,29.08 0 top
U$54  [#_ATXO#0]  46.76,26.54 0 top
U$55  [#_AEN#0]  46.76,31.62 0 top
U$56  [#RGB_#0]  68.66,59 90 bottom
U$57  [#USRBTN#0]  65.26,60.8 90 top
U$58  [RGB0]  67.96,59.1 0 top
U$59  [AEN1]  97.66,57.3 0 top
U$60  [VIN3]  97.66,60.8 0 top
U$61  [VIO4]  97.66,64.3 0 top
U$62  [SFE_LOGO_FLAME_STOP_.1]  86.46,46.5 0 top
U$63  [#_GND_#0]  84.76,24 0 top
U$64  [SFE_LOGO_NAME_FLAME_.2]  101.61,43 0 bottom
U$65  [#_WP#2]  115.56,8.7 0 bottom
U$66  [#MEAS#4]  90.86,8.2 90 bottom
U$67  [#MEAS#4]  94.26,8.2 90 top
U$68  [#_ANT_PWR#5]  101.56,23 0 bottom
U$69  [#PWR_LED_#17]  105.26,59.7 0 bottom
U$70  [#AUX_EN_LED_#20]  107.66,56.2 0 bottom
U$71  [#VIO_LED_#21]  104.86,63.1 0 bottom
U$72  [#_SHLD#23]  116.86,62 0 bottom
U$73  [#_GND_#24]  89.86,24 0 bottom
U$74  [MICROMOD_MI_LOGO_.35]  86.46,42.2 0 top
U$75  [#AUX_EN_#0]  92.16,31.62 0 bottom
U$76  [NOTEHUB_BLUES#SVG5]  96.26,54 0 top
U$77  [MICROMOD_LOGO_.5]  101.86,40.3 0 bottom
U$78  [BLUES_WIRELESS_NOTECARRIER0]  101.61,37.7 0 bottom
U$79  [NOTEHUB_BLUES#SVG7]  103.61,32.5 0 bottom
U$80  [#AUX_TX_#0]  92.36,26.54 0 bottom
U$81  [#AUX_RX_#0]  92.16,29.08 0 bottom
U$82  [#_ARXI#0]  84.76,29.08 0 top
U$83  [#_ATXO#0]  84.76,26.54 0 top
U$84  [#_AEN#0]  84.76,31.62 0 top
U$85  [#RGB_#0]  106.66,59 90 bottom
U$86  [#USRBTN#0]  103.26,60.8 90 top
U$87  [RGB0]  105.96,59.1 0 top
U$88  [AEN1]  29.55,79.05 180 top
U$89  [VIN3]  29.55,75.55 180 top
U$90  [VIO4]  29.55,72.05 180 top
U$91  [SFE_LOGO_FLAME_STOP_.1]  40.75,89.85 180 top
U$92  [#_GND_#0]  42.45,112.35 180 top
U$93  [SFE_LOGO_NAME_FLAME_.2]  25.6,93.35 180 bottom
U$94  [#_WP#2]  11.65,127.65 180 bottom
U$95  [#MEAS#4]  36.35,128.15 270 bottom
U$96  [#MEAS#4]  32.95,128.15 270 top
U$97  [#_ANT_PWR#5]  25.65,113.35 180 bottom
U$98  [#PWR_LED_#17]  21.95,76.65 180 bottom
U$99  [#AUX_EN_LED_#20]  19.55,80.15 180 bottom
U$100  [#VIO_LED_#21]  22.35,73.25 180 bottom
U$101  [#_SHLD#23]  10.35,74.35 180 bottom
U$102  [#_GND_#24]  37.35,112.35 180 bottom
U$103  [MICROMOD_MI_LOGO_.35]  40.75,94.15 180 top
U$104  [#AUX_EN_#0]  35.05,104.73 180 bottom
U$105  [NOTEHUB_BLUES#SVG5]  30.95,82.35 180 top
U$106  [MICROMOD_LOGO_.5]  25.35,96.05 180 bottom
U$107  [BLUES_WIRELESS_NOTECARRIER0]  25.6,98.65 180 bottom
U$108  [NOTEHUB_BLUES#SVG7]  23.6,103.85 180 bottom
U$109  [#AUX_TX_#0]  34.85,109.81 180 bottom
U$110  [#AUX_RX_#0]  35.05,107.27 180 bottom
U$111  [#_ARXI#0]  42.45,107.27 180 top
U$112  [#_ATXO#0]  42.45,109.81 180 top
U$113  [#_AEN#0]  42.45,104.73 180 top
U$114  [#RGB_#0]  20.55,77.35 270 bottom
U$115  [#USRBTN#0]  23.95,75.55 270 top
U$116  [RGB0]  21.25,77.25 180 top
U$117  [AEN1]  67.55,79.05 180 top
U$118  [VIN3]  67.55,75.55 180 top
U$119  [VIO4]  67.55,72.05 180 top
U$120  [SFE_LOGO_FLAME_STOP_.1]  78.75,89.85 180 top
U$121  [#_GND_#0]  80.45,112.35 180 top
U$122  [SFE_LOGO_NAME_FLAME_.2]  63.6,93.35 180 bottom
U$123  [#_WP#2]  49.65,127.65 180 bottom
U$124  [#MEAS#4]  74.35,128.15 270 bottom
U$125  [#MEAS#4]  70.95,128.15 270 top
U$126  [#_ANT_PWR#5]  63.65,113.35 180 bottom
U$127  [#PWR_LED_#17]  59.95,76.65 180 bottom
U$128  [#AUX_EN_LED_#20]  57.55,80.15 180 bottom
U$129  [#VIO_LED_#21]  60.35,73.25 180 bottom
U$130  [#_SHLD#23]  48.35,74.35 180 bottom
U$131  [#_GND_#24]  75.35,112.35 180 bottom
U$132  [MICROMOD_MI_LOGO_.35]  78.75,94.15 180 top
U$133  [#AUX_EN_#0]  73.05,104.73 180 bottom
U$134  [NOTEHUB_BLUES#SVG5]  68.95,82.35 180 top
U$135  [MICROMOD_LOGO_.5]  63.35,96.05 180 bottom
U$136  [BLUES_WIRELESS_NOTECARRIER0]  63.6,98.65 180 bottom
U$137  [NOTEHUB_BLUES#SVG7]  61.6,103.85 180 bottom
U$138  [#AUX_TX_#0]  72.85,109.81 180 bottom
U$139  [#AUX_RX_#0]  73.05,107.27 180 bottom
U$140  [#_ARXI#0]  80.45,107.27 180 top
U$141  [#_ATXO#0]  80.45,109.81 180 top
U$142  [#_AEN#0]  80.45,104.73 180 top
U$143  [#RGB_#0]  58.55,77.35 270 bottom
U$144  [#USRBTN#0]  61.95,75.55 270 top
U$145  [RGB0]  59.25,77.25 180 top
U$146  [AEN1]  105.55,79.05 180 top
U$147  [VIN3]  105.55,75.55 180 top
U$148  [VIO4]  105.55,72.05 180 top
U$149  [SFE_LOGO_FLAME_STOP_.1]  116.75,89.85 180 top
U$150  [#_GND_#0]  118.45,112.35 180 top
U$151  [SFE_LOGO_NAME_FLAME_.2]  101.6,93.35 180 bottom
U$152  [#_WP#2]  87.65,127.65 180 bottom
U$153  [#MEAS#4]  112.35,128.15 270 bottom
U$154  [#MEAS#4]  108.95,128.15 270 top
U$155  [#_ANT_PWR#5]  101.65,113.35 180 bottom
U$156  [#PWR_LED_#17]  97.95,76.65 180 bottom
U$157  [#AUX_EN_LED_#20]  95.55,80.15 180 bottom
U$158  [#VIO_LED_#21]  98.35,73.25 180 bottom
U$159  [#_SHLD#23]  86.35,74.35 180 bottom
U$160  [#_GND_#24]  113.35,112.35 180 bottom
U$161  [MICROMOD_MI_LOGO_.35]  116.75,94.15 180 top
U$162  [#AUX_EN_#0]  111.05,104.73 180 bottom
U$163  [NOTEHUB_BLUES#SVG5]  106.95,82.35 180 top
U$164  [MICROMOD_LOGO_.5]  101.35,96.05 180 bottom
U$165  [BLUES_WIRELESS_NOTECARRIER0]  101.6,98.65 180 bottom
U$166  [NOTEHUB_BLUES#SVG7]  99.6,103.85 180 bottom
U$167  [#AUX_TX_#0]  110.85,109.81 180 bottom
U$168  [#AUX_RX_#0]  111.05,107.27 180 bottom
U$169  [#_ARXI#0]  118.45,107.27 180 top
U$170  [#_ATXO#0]  118.45,109.81 180 top
U$171  [#_AEN#0]  118.45,104.73 180 top
U$172  [#RGB_#0]  96.55,77.35 270 bottom
U$173  [#USRBTN#0]  99.95,75.55 270 top
U$174  [RGB0]  97.25,77.25 180 top
VIO_LED  JUMPER-SMT_2_NC_TRACE_SILK  [SMT-JUMPER_2_NC_TRACE_SILK]  21.46,63.1 0 bottom
VIO_LED1  JUMPER-SMT_2_NC_TRACE_SILK  [SMT-JUMPER_2_NC_TRACE_SILK]  59.46,63.1 0 bottom
VIO_LED2  JUMPER-SMT_2_NC_TRACE_SILK  [SMT-JUMPER_2_NC_TRACE_SILK]  97.46,63.1 0 bottom
VIO_LED3  JUMPER-SMT_2_NC_TRACE_SILK  [SMT-JUMPER_2_NC_TRACE_SILK]  29.75,73.25 180 bottom
VIO_LED4  JUMPER-SMT_2_NC_TRACE_SILK  [SMT-JUMPER_2_NC_TRACE_SILK]  67.75,73.25 180 bottom
VIO_LED5  JUMPER-SMT_2_NC_TRACE_SILK  [SMT-JUMPER_2_NC_TRACE_SILK]  105.75,73.25 180 bottom
WP  JUMPER-SMT_2_NO_SILK  [SMT-JUMPER_2_NO_SILK]  40.26,8.7 90 bottom
WP1  JUMPER-SMT_2_NO_SILK  [SMT-JUMPER_2_NO_SILK]  78.26,8.7 90 bottom
WP2  JUMPER-SMT_2_NO_SILK  [SMT-JUMPER_2_NO_SILK]  116.26,8.7 90 bottom
WP3  JUMPER-SMT_2_NO_SILK  [SMT-JUMPER_2_NO_SILK]  10.95,127.65 270 bottom
WP4  JUMPER-SMT_2_NO_SILK  [SMT-JUMPER_2_NO_SILK]  48.95,127.65 270 bottom
WP5  JUMPER-SMT_2_NO_SILK  [SMT-JUMPER_2_NO_SILK]  86.95,127.65 270 bottom

## Library data of the parts
ANT_PWR ANT_PWR1-ANT_PWR5 AUX_EN_LED AUX_EN_LED1-AUX_EN_LED5 MEAS MEAS1-MEAS5 PWR_LED PWR_LED1-PWR_LED5 RGB RGB1-RGB5 SHLD SHLD1-SHLD5 VIO_LED VIO_LED1-VIO_LED5 WP WP1-WP5 = SparkFun-Jumpers
C1 C5-C7 C10 C11 C14 C15 C17 C20 C21 C24 C25 C27 C30 C31 C34 C35 C37 C40 C41 C44 C45 C47 C50 C51 C54 C55 C57 C60 = SparkFun-Capacitors; PROD_ID: CAP-12416
C2 C16 C26 C36 C46 C56 = SparkFun-Capacitors; PROD_ID: CAP-11330
C3 C4 C12 C13 C22 C23 C32 C33 C42 C43 C52 C53 = SparkFun-Capacitors; PROD_ID: CAP-12547
C8 C9 C18 C19 C28 C29 C38 C39 C48 C49 C58 C59 = SparkFun-Capacitors; PROD_ID: CAP-12417
D1 D2 D14 D15 D24 D25 D34 D35 D44 D45 D54 D55 = SparkFun-LED; PROD_ID: DIO-00819
D3 D16 D26 D36 D46 D56 = SparkFun-LED; PROD_ID: DIO-08575
D4 D11 D21 D31 D41 D51 = SparkFun-IC-Power; PROD_ID: DIO-14084
D5 D6 D12 D13 D22 D23 D32 D33 D42 D43 D52 D53 = SparkFun-DiscreteSemi; PROD_ID: DIO-14072
D7 D8 D17 D18 D27 D28 D37 D38 D47 D48 D57 D58 = SparkFun-DiscreteSemi; PROD_ID: DIO-10955
D9 D19 D29 D39 D49 D59 = SparkFun_MicroMod_Function_Board_Blues_Notecarrier; I_PP: 58.1A; PROD_ID: DIO-17055; P_PK: 600W; VCLMP: 10.5V; VWM: 5.8V
D10 D20 D30 D40 D50 D60 = SparkFun-LED; PROD_ID: DIO-15591
E$1-E$4 FD1-FD24 LOGO1-LOGO12 U$6 U$14 U$33 U$35 U$62 U$64 U$91 U$93 U$120 U$122 U$149 U$151 = SparkFun-Aesthetics
E$5 E$6 = SparkFun-Retired
H1-H6 = SparkFun-Hardware; PROD_ID: HW-14899
J1 J4 J11 J16 J21 J26 = SparkFun-Connectors; PROD_ID: CONN-14122
J2 J9 J14 J19 J24 J29 U$29 U$31 U$45 U$48 U$74 U$77 U$103 U$106 U$132 U$135 U$161 U$164 = SparkFun-MicroMod
J3 J10 J15 J20 J25 J30 = SparkFun-Connectors
J5 J7 J12 J17 J22 J27 = SparkFun-Connectors; PROD_ID: CONN-15682
J6 J8 J13 J18 J23 J28 = SparkFun_MicroMod_Function_Board_Blues_Notecarrier; PROD_ID: CONN-14877
Q1 Q3 Q5 Q7 Q11 Q12 Q16 Q17 Q21 Q22 Q26 Q27 = SparkFun-DiscreteSemi; PROD_ID: TRANS-00830
Q2 Q4 Q6 Q8-Q10 Q13-Q15 Q18-Q20 Q23-Q25 Q28-Q30 = SparkFun-DiscreteSemi; PROD_ID: TRANS-14388
R1 R2 R24 R25 R40 R41 R56 R57 R72 R73 R88 R89 = SparkFun-Resistors; PROD_ID: RES-14342
R3 R4 R22 R23 R38 R39 R54 R55 R70 R71 R86 R87 = SparkFun-Resistors; PROD_ID: RES-14340
R5 R7 R9-R11 R13 R17 R19-R21 R28 R32 R33 R35-R37 R44 R48 R49 R51-R53 R60 R64 R65 R67-R69 R76 R80 R81 R83-R85 R92 R96 = SparkFun-Resistors; PROD_ID: RES-14241
R6 R26 R42 R58 R74 R90 = SparkFun-Resistors; PROD_ID: RES-14341
R8 R18 R34 R50 R66 R82 = SparkFun-Resistors; PROD_ID: RES-13766
R12 R27 R43 R59 R75 R91 = SparkFun-Resistors; PROD_ID: RES-14844
R14 R15 R29 R30 R45 R46 R61 R62 R77 R78 R93 R94 = SparkFun-Resistors; PROD_ID: RES-14962
R16 R31 R47 R63 R79 R95 = SparkFun-Resistors; PROD_ID: RES-08269
S1-S6 = SparkFun-Switches; PROD_ID: SWCH-15606
U1 U3 U5 U7 U9 U11 = SparkFun-IC-Memory; PROD_ID: IC-14645
U2 U4 U6 U8 U10 U12 = SparkFun_MicroMod_Function_Board_Blues_Notecarrier; PROD_ID: VREG-16875
U$1-U$5 U$7-U$9 U$11-U$13 U$15-U$22 U$24-U$28 U$30 U$32 U$34 U$36-U$44 U$46 U$49 U$51-U$61 U$63 U$65-U$73 U$75 U$78 U$80-U$90 U$92 U$94-U$102 U$104 U$107 U$109-U$119 U$121 U$123-U$131 U$133 U$136 U$138-U$148 U$150 U$152-U$160 U$162 U$165 U$167-U$174 = output
U$10 U$23 U$47 U$50 U$76 U$79 U$105 U$108 U$134 U$137 U$163 U$166 = notehub

## Nets
3.3V [Power]: C1.1 C7.1 D1.A D7.C D8.C J6.2 J6.4 Q6.2 R5.1 RGB.2 U1.8
3.3V1 [Power]: C11.1 C14.1 D14.A D17.C D18.C J8.2 J8.4 Q10.2 R17.1 RGB1.2 U3.8
3.3V2 [Power]: C21.1 C24.1 D24.A D27.C D28.C J13.2 J13.4 Q15.2 R33.1 RGB2.2 U5.8
3.3V3 [Power]: C31.1 C34.1 D34.A D37.C D38.C J18.2 J18.4 Q20.2 R49.1 RGB3.2 U7.8
3.3V4 [Power]: C41.1 C44.1 D44.A D47.C D48.C J23.2 J23.4 Q25.2 R65.1 RGB4.2 U9.8
3.3V5 [Power]: C51.1 C54.1 D54.A D57.C D58.C J28.2 J28.4 Q30.2 R81.1 RGB5.2 U11.8
3V3_IN [Power]: J2.73 Q2.2 R7.1 R9.2
3V3_IN1 [Power]: J9.73 Q8.2 R19.1 R20.2
3V3_IN2 [Power]: J14.73 Q13.2 R35.1 R36.2
3V3_IN3 [Power]: J19.73 Q18.2 R51.1 R52.2
3V3_IN4 [Power]: J24.73 Q23.2 R67.1 R68.2
3V3_IN5 [Power]: J29.73 Q28.2 R83.1 R84.2
!AUX_PWR!: J2.55 Q6.1 R10.2
!AUX_PWR!1: J9.55 Q10.1 R32.2
!AUX_PWR!2: J14.55 Q15.1 R48.2
!AUX_PWR!3: J19.55 Q20.1 R64.2
!AUX_PWR!4: J24.55 Q25.1 R80.2
!AUX_PWR!5: J29.55 Q30.1 R96.2
A0: J2.36 U1.1
A1: J2.34 U1.2
A2: J2.32 U1.3
A3: J9.36 U3.1
A4: J9.32 U3.3
A5: J9.34 U3.2
A6: J14.36 U5.1
A7: J14.32 U5.3
A8: J14.34 U5.2
A9: J19.36 U7.1
A10: J19.32 U7.3
A11: J19.34 U7.2
A12: J24.36 U9.1
A13: J24.32 U9.3
A14: J24.34 U9.2
A15: J29.36 U11.1
A16: J29.32 U11.3
A17: J29.34 U11.2
ATTN: J2.53 J6.54
ATTN1: J8.54 J9.53
ATTN2: J13.54 J14.53
ATTN3: J18.54 J19.53
ATTN4: J23.54 J24.53
ATTN5: J28.54 J29.53
AUX1/DFU_!ACTIVE!/USR_BTN: C9.1 D9.C J2.10 J6.46 S1.3 S1.4
AUX1/DFU_!ACTIVE!/USR_BTN1: C19.1 D19.C J8.46 J9.10 S2.3 S2.4
AUX1/DFU_!ACTIVE!/USR_BTN2: C29.1 D29.C J13.46 J14.10 S3.3 S3.4
AUX1/DFU_!ACTIVE!/USR_BTN3: C39.1 D39.C J18.46 J19.10 S4.3 S4.4
AUX1/DFU_!ACTIVE!/USR_BTN4: C49.1 D49.C J23.46 J24.10 S5.3 S5.4
AUX1/DFU_!ACTIVE!/USR_BTN5: C59.1 D59.C J28.46 J29.10 S6.3 S6.4
AUX2/RGB: D10.DI J2.57 J6.48
AUX2/RGB1: D20.DI J8.48 J9.57
AUX2/RGB2: D30.DI J13.48 J14.57
AUX2/RGB3: D40.DI J18.48 J19.57
AUX2/RGB4: D50.DI J23.48 J24.57
AUX2/RGB5: D60.DI J28.48 J29.57
AUX3/DFU_!BOOT!: J2.66 J6.50
AUX3/DFU_!BOOT!1: J8.50 J9.66
AUX3/DFU_!BOOT!2: J13.50 J14.66
AUX3/DFU_!BOOT!3: J18.50 J19.66
AUX3/DFU_!BOOT!4: J23.50 J24.66
AUX3/DFU_!BOOT!5: J28.50 J29.66
AUX4/DFU_!RST!: J2.68 J6.52
AUX4/DFU_!RST!1: J8.52 J9.68
AUX4/DFU_!RST!2: J13.52 J14.68
AUX4/DFU_!RST!3: J18.52 J19.68
AUX4/DFU_!RST!4: J23.52 J24.68
AUX4/DFU_!RST!5: J28.52 J29.68
AUX_EN: D3.A J3.4 J6.56 Q6.3
AUX_EN1: D16.A J8.56 J10.4 Q10.3
AUX_EN2: D26.A J13.56 J15.4 Q15.3
AUX_EN3: D36.A J18.56 J20.4 Q20.3
AUX_EN4: D46.A J23.56 J25.4 Q25.3
AUX_EN5: D56.A J28.56 J30.4 Q30.3
AUX_RX/MCU_TX: J2.6 J3.3 J6.58
AUX_RX/MCU_TX1: J8.58 J9.6 J10.3
AUX_RX/MCU_TX2: J13.58 J14.6 J15.3
AUX_RX/MCU_TX3: J18.58 J19.6 J20.3
AUX_RX/MCU_TX4: J23.58 J24.6 J25.3
AUX_RX/MCU_TX5: J28.58 J29.6 J30.3
AUX_TX/MCU_RX: J2.4 J3.2 J6.60
AUX_TX/MCU_RX1: J8.60 J9.4 J10.2
AUX_TX/MCU_RX2: J13.60 J14.4 J15.2
AUX_TX/MCU_RX3: J18.60 J19.4 J20.2
AUX_TX/MCU_RX4: J23.60 J24.4 J25.2
AUX_TX/MCU_RX5: J28.60 J29.4 J30.2
EWP: J2.40 R5.2 U1.7 WP.2
EWP1: J9.40 R17.2 U3.7 WP1.2
EWP2: J14.40 R33.2 U5.7 WP2.2
EWP3: J19.40 R49.2 U7.7 WP3.2
EWP4: J24.40 R65.2 U9.7 WP4.2
EWP5: J29.40 R81.2 U11.7 WP5.2
GND [GND]: AUX_EN_LED.1 C1.2 C2.2 C3.- C4.- C5.2 C6.2 C7.2 C8.2 C9.2 C10.2 D4.2 D9.A D10.GND H1.1 J1.GND J1.GND2 J2.1 J2.2 J2.8 J2.33 J2.39 J2.45 J2.75 J2.GND1 J2.GND2 J2.GND3 J2.GND4 J2.GND5 J2.GND6 J3.1 J5.G1 J5.G2 J5.G3 J5.G4 J5.S4 J6.3 J6.5 J6.6 J6.11 J6.18 J6.33 J6.39 J6.45 J6.51 J6.57 J6.71 J6.73 PWR_LED.1 Q1.2 Q3.2 R3.1 R4.1 R10.1 R12.1 S1.1 S1.2 SHLD.1 U1.4 U2.2 VIO_LED.1 WP.1
GND1 [GND]: AUX_EN_LED1.1 C11.2 C12.- C13.- C14.2 C15.2 C16.2 C17.2 C18.2 C19.2 C20.2 D11.2 D19.A D20.GND H2.1 J4.GND J4.GND2 J7.G1 J7.G2 J7.G3 J7.G4 J7.S4 J8.3 J8.5 J8.6 J8.11 J8.18 J8.33 J8.39 J8.45 J8.51 J8.57 J8.71 J8.73 J9.1 J9.2 J9.8 J9.33 J9.39 J9.45 J9.75 J9.GND1 J9.GND2 J9.GND3 J9.GND4 J9.GND5 J9.GND6 J10.1 PWR_LED1.1 Q5.2 Q7.2 R22.1 R23.1 R27.1 R32.1 S2.1 S2.2 SHLD1.1 U3.4 U4.2 VIO_LED1.1 WP1.1
GND2 [GND]: AUX_EN_LED2.1 C21.2 C22.- C23.- C24.2 C25.2 C26.2 C27.2 C28.2 C29.2 C30.2 D21.2 D29.A D30.GND H3.1 J11.GND J11.GND2 J12.G1 J12.G2 J12.G3 J12.G4 J12.S4 J13.3 J13.5 J13.6 J13.11 J13.18 J13.33 J13.39 J13.45 J13.51 J13.57 J13.71 J13.73 J14.1 J14.2 J14.8 J14.33 J14.39 J14.45 J14.75 J14.GND1 J14.GND2 J14.GND3 J14.GND4 J14.GND5 J14.GND6 J15.1 PWR_LED2.1 Q11.2 Q12.2 R38.1 R39.1 R43.1 R48.1 S3.1 S3.2 SHLD2.1 U5.4 U6.2 VIO_LED2.1 WP2.1
GND3 [GND]: AUX_EN_LED3.1 C31.2 C32.- C33.- C34.2 C35.2 C36.2 C37.2 C38.2 C39.2 C40.2 D31.2 D39.A D40.GND H4.1 J16.GND J16.GND2 J17.G1 J17.G2 J17.G3 J17.G4 J17.S4 J18.3 J18.5 J18.6 J18.11 J18.18 J18.33 J18.39 J18.45 J18.51 J18.57 J18.71 J18.73 J19.1 J19.2 J19.8 J19.33 J19.39 J19.45 J19.75 J19.GND1 J19.GND2 J19.GND3 J19.GND4 J19.GND5 J19.GND6 J20.1 PWR_LED3.1 Q16.2 Q17.2 R54.1 R55.1 R59.1 R64.1 S4.1 S4.2 SHLD3.1 U7.4 U8.2 VIO_LED3.1 WP3.1
GND4 [GND]: AUX_EN_LED4.1 C41.2 C42.- C43.- C44.2 C45.2 C46.2 C47.2 C48.2 C49.2 C50.2 D41.2 D49.A D50.GND H5.1 J21.GND J21.GND2 J22.G1 J22.G2 J22.G3 J22.G4 J22.S4 J23.3 J23.5 J23.6 J23.11 J23.18 J23.33 J23.39 J23.45 J23.51 J23.57 J23.71 J23.73 J24.1 J24.2 J24.8 J24.33 J24.39 J24.45 J24.75 J24.GND1 J24.GND2 J24.GND3 J24.GND4 J24.GND5 J24.GND6 J25.1 PWR_LED4.1 Q21.2 Q22.2 R70.1 R71.1 R75.1 R80.1 S5.1 S5.2 SHLD4.1 U9.4 U10.2 VIO_LED4.1 WP4.1
GND5 [GND]: AUX_EN_LED5.1 C51.2 C52.- C53.- C54.2 C55.2 C56.2 C57.2 C58.2 C59.2 C60.2 D51.2 D59.A D60.GND H6.1 J26.GND J26.GND2 J27.G1 J27.G2 J27.G3 J27.G4 J27.S4 J28.3 J28.5 J28.6 J28.11 J28.18 J28.33 J28.39 J28.45 J28.51 J28.57 J28.71 J28.73 J29.1 J29.2 J29.8 J29.33 J29.39 J29.45 J29.75 J29.GND1 J29.GND2 J29.GND3 J29.GND4 J29.GND5 J29.GND6 J30.1 PWR_LED5.1 Q26.2 Q27.2 R86.1 R87.1 R91.1 R96.1 S6.1 S6.2 SHLD5.1 U11.4 U12.2 VIO_LED5.1 WP5.1
N$1: J2.71 R8.2
N$2: Q2.1 R9.1 R14.2
N$3: Q4.1 R11.1 R15.2
N$4: D1.C R1.2
N$5: R13.1 U2.3
N$6: D2.C R2.2
N$7 [Power]: D8.A Q2.3
N$8: J1.B5 R3.2
N$9: J1.A5 R4.2
N$10 [Power]: C8.1 D7.A U2.5
N$11: PWR_LED.2 R2.1
N$12: R1.1 VIO_LED.2
N$13: D3.C R6.2
N$14: AUX_EN_LED.2 R6.1
N$15: Q1.3 R14.1
N$16: Q3.3 R15.1
N$17: MEAS.2 MEAS.4 R16.1
N$18: C10.1 D10.VCC RGB.1
N$19: J9.71 R18.2
N$20: Q8.1 R20.1 R29.2
N$21: Q9.1 R21.1 R30.2
N$22: J4.B5 R22.2
N$23: J4.A5 R23.2
N$24 [Power]: D12.C D13.C MEAS1.1 MEAS1.3
N$25: D14.C R24.2
N$26: D15.C R25.2
N$27: PWR_LED1.2 R25.1
N$28: R24.1 VIO_LED1.2
N$29: D16.C R26.2
N$30: AUX_EN_LED1.2 R26.1
N$31: R28.1 U4.3
N$32 [Power]: C18.1 D17.A U4.5
N$33 [Power]: D18.A Q8.3
N$34: Q5.3 R29.1
N$35: Q7.3 R30.1
N$36: MEAS1.2 MEAS1.4 R31.1
N$37 [Power]: D5.C D6.C MEAS.1 MEAS.3
N$38: C20.1 D20.VCC RGB1.1
N$39: J14.71 R34.2
N$40: Q13.1 R36.1 R45.2
N$41: Q14.1 R37.1 R46.2
N$42: J11.B5 R38.2
N$43: J11.A5 R39.2
N$44 [Power]: D22.C D23.C MEAS2.1 MEAS2.3
N$45: D24.C R40.2
N$46: D25.C R41.2
N$47: PWR_LED2.2 R41.1
N$48: R40.1 VIO_LED2.2
N$49: D26.C R42.2
N$50: AUX_EN_LED2.2 R42.1
N$51: R44.1 U6.3
N$52 [Power]: C28.1 D27.A U6.5
N$53 [Power]: D28.A Q13.3
N$54: Q11.3 R45.1
N$55: Q12.3 R46.1
N$56: MEAS2.2 MEAS2.4 R47.1
N$57: C30.1 D30.VCC RGB2.1
N$58: J19.71 R50.2
N$59: Q18.1 R52.1 R61.2
N$60: Q19.1 R53.1 R62.2
N$61: J16.B5 R54.2
N$62: J16.A5 R55.2
N$63 [Power]: D32.C D33.C MEAS3.1 MEAS3.3
N$64: D34.C R56.2
N$65: D35.C R57.2
N$66: PWR_LED3.2 R57.1
N$67: R56.1 VIO_LED3.2
N$68: D36.C R58.2
N$69: AUX_EN_LED3.2 R58.1
N$70: R60.1 U8.3
N$71 [Power]: C38.1 D37.A U8.5
N$72 [Power]: D38.A Q18.3
N$73: Q16.3 R61.1
N$74: Q17.3 R62.1
N$75: MEAS3.2 MEAS3.4 R63.1
N$76: C40.1 D40.VCC RGB3.1
N$77: J24.71 R66.2
N$78: Q23.1 R68.1 R77.2
N$79: Q24.1 R69.1 R78.2
N$80: J21.B5 R70.2
N$81: J21.A5 R71.2
N$82 [Power]: D42.C D43.C MEAS4.1 MEAS4.3
N$83: D44.C R72.2
N$84: D45.C R73.2
N$85: PWR_LED4.2 R73.1
N$86: R72.1 VIO_LED4.2
N$87: D46.C R74.2
N$88: AUX_EN_LED4.2 R74.1
N$89: R76.1 U10.3
N$90 [Power]: C48.1 D47.A U10.5
N$91 [Power]: D48.A Q23.3
N$92: Q21.3 R77.1
N$93: Q22.3 R78.1
N$94: MEAS4.2 MEAS4.4 R79.1
N$95: C50.1 D50.VCC RGB4.1
N$96: J29.71 R82.2
N$97: Q28.1 R84.1 R93.2
N$98: Q29.1 R85.1 R94.2
N$99: J26.B5 R86.2
N$100: J26.A5 R87.2
N$101 [Power]: D52.C D53.C MEAS5.1 MEAS5.3
N$102: D54.C R88.2
N$103: D55.C R89.2
N$104: PWR_LED5.2 R89.1
N$105: R88.1 VIO_LED5.2
N$106: D56.C R90.2
N$107: AUX_EN_LED5.2 R90.1
N$108: R92.1 U12.3
N$109 [Power]: C58.1 D57.A U12.5
N$110 [Power]: D58.A Q28.3
N$111: Q26.3 R93.1
N$112: Q27.3 R94.1
N$113: MEAS5.2 MEAS5.4 R95.1
N$114: C60.1 D60.VCC RGB5.1
NOTECARD_RX: J2.15 J6.62
NOTECARD_RX1: J8.62 J9.15
NOTECARD_RX2: J13.62 J14.15
NOTECARD_RX3: J18.62 J19.15
NOTECARD_RX4: J23.62 J24.15
NOTECARD_RX5: J28.62 J29.15
NOTECARD_TX: J2.13 J6.64
NOTECARD_TX1: J8.64 J9.13
NOTECARD_TX2: J13.64 J14.13
NOTECARD_TX3: J18.64 J19.13
NOTECARD_TX4: J23.64 J24.13
NOTECARD_TX5: J28.64 J29.13
PWR_EN: Q1.1 Q3.1 R7.2 R8.1
PWR_EN1: Q5.1 Q7.1 R18.1 R19.2
PWR_EN2: Q11.1 Q12.1 R34.1 R35.2
PWR_EN3: Q16.1 Q17.1 R50.1 R51.2
PWR_EN4: Q21.1 Q22.1 R66.1 R67.2
PWR_EN5: Q26.1 Q27.1 R82.1 R83.2
SCL: J2.21 J6.40 U1.6
SCL1: J8.40 J9.21 U3.6
SCL2: J13.40 J14.21 U5.6
SCL3: J18.40 J19.21 U7.6
SCL4: J23.40 J24.21 U9.6
SCL5: J28.40 J29.21 U11.6
SDA: J2.19 J6.42 U1.5
SDA1: J8.42 J9.19 U3.5
SDA2: J13.42 J14.19 U5.5
SDA3: J18.42 J19.19 U7.5
SDA4: J23.42 J24.19 U9.5
SDA5: J28.42 J29.19 U11.5
SHLD: J1.SHLD1 J1.SHLD2 J1.SHLD3 J1.SHLD4 SHLD.2
SHLD1: J4.SHLD1 J4.SHLD2 J4.SHLD3 J4.SHLD4 SHLD1.2
SHLD2: J11.SHLD1 J11.SHLD2 J11.SHLD3 J11.SHLD4 SHLD2.2
SHLD3: J16.SHLD1 J16.SHLD2 J16.SHLD3 J16.SHLD4 SHLD3.2
SHLD4: J21.SHLD1 J21.SHLD2 J21.SHLD3 J21.SHLD4 SHLD4.2
SHLD5: J26.SHLD1 J26.SHLD2 J26.SHLD3 J26.SHLD4 SHLD5.2
SIM_CLK: J5.S3 J6.14
SIM_CLK1: J7.S3 J8.14
SIM_CLK2: J12.S3 J13.14
SIM_CLK3: J17.S3 J18.14
SIM_CLK4: J22.S3 J23.14
SIM_CLK5: J27.S3 J28.14
SIM_IO: J5.S6 J6.12
SIM_IO1: J7.S6 J8.12
SIM_IO2: J12.S6 J13.12
SIM_IO3: J17.S6 J18.12
SIM_IO4: J22.S6 J23.12
SIM_IO5: J27.S6 J28.12
SIM_RST: J5.S2 J6.10
SIM_RST1: J7.S2 J8.10
SIM_RST2: J12.S2 J13.10
SIM_RST3: J17.S2 J18.10
SIM_RST4: J22.S2 J23.10
SIM_RST5: J27.S2 J28.10
SIM_VCC [Power]: C2.1 J5.S1 J6.8
SIM_VCC1 [Power]: C16.1 J7.S1 J8.8
SIM_VCC2 [Power]: C26.1 J12.S1 J13.8
SIM_VCC3 [Power]: C36.1 J17.S1 J18.8
SIM_VCC4 [Power]: C46.1 J22.S1 J23.8
SIM_VCC5 [Power]: C56.1 J27.S1 J28.8
USB_IN_N [USB_DIFF]: D4.3 J1.A7 J1.B7
USB_IN_N1 [USB_DIFF]: D11.3 J4.A7 J4.B7
USB_IN_N2 [USB_DIFF]: D21.3 J11.A7 J11.B7
USB_IN_N3 [USB_DIFF]: D31.3 J16.A7 J16.B7
USB_IN_N4 [USB_DIFF]: D41.3 J21.A7 J21.B7
USB_IN_N5 [USB_DIFF]: D51.3 J26.A7 J26.B7
USB_IN_P [USB_DIFF]: D4.1 J1.A6 J1.B6
USB_IN_P1 [USB_DIFF]: D11.1 J4.A6 J4.B6
USB_IN_P2 [USB_DIFF]: D21.1 J11.A6 J11.B6
USB_IN_P3 [USB_DIFF]: D31.1 J16.A6 J16.B6
USB_IN_P4 [USB_DIFF]: D41.1 J21.A6 J21.B6
USB_IN_P5 [USB_DIFF]: D51.1 J26.A6 J26.B6
USB_N [USB_DIFF]: D4.4 J6.9
USB_N1 [USB_DIFF]: D11.4 J8.9
USB_N2 [USB_DIFF]: D21.4 J13.9
USB_N3 [USB_DIFF]: D31.4 J18.9
USB_N4 [USB_DIFF]: D41.4 J23.9
USB_N5 [USB_DIFF]: D51.4 J28.9
USB_P [USB_DIFF]: D4.6 J6.7
USB_P1 [USB_DIFF]: D11.6 J8.7
USB_P2 [USB_DIFF]: D21.6 J13.7
USB_P3 [USB_DIFF]: D31.6 J18.7
USB_P4 [USB_DIFF]: D41.6 J23.7
USB_P5 [USB_DIFF]: D51.6 J28.7
V_USB [Power]: D4.5 D5.A J1.VBUS1 J1.VBUS2 J6.13
V_USB1 [Power]: D11.5 D12.A J4.VBUS1 J4.VBUS2 J8.13
V_USB2 [Power]: D21.5 D22.A J11.VBUS1 J11.VBUS2 J13.13
V_USB3 [Power]: D31.5 D32.A J16.VBUS1 J16.VBUS2 J18.13
V_USB4 [Power]: D41.5 D42.A J21.VBUS1 J21.VBUS2 J23.13
V_USB5 [Power]: D51.5 D52.A J26.VBUS1 J26.VBUS2 J28.13
VACT_GPS_IN [Power]: ANT_PWR.2 J6.22
VACT_GPS_IN1 [Power]: ANT_PWR1.2 J8.22
VACT_GPS_IN2 [Power]: ANT_PWR2.2 J13.22
VACT_GPS_IN3 [Power]: ANT_PWR3.2 J18.22
VACT_GPS_IN4 [Power]: ANT_PWR4.2 J23.22
VACT_GPS_IN5 [Power]: ANT_PWR5.2 J28.22
VACT_GPS_OUT [Power]: ANT_PWR.1 J6.20
VACT_GPS_OUT1 [Power]: ANT_PWR1.1 J8.20
VACT_GPS_OUT2 [Power]: ANT_PWR2.1 J13.20
VACT_GPS_OUT3 [Power]: ANT_PWR3.1 J18.20
VACT_GPS_OUT4 [Power]: ANT_PWR4.1 J23.20
VACT_GPS_OUT5 [Power]: ANT_PWR5.1 J28.20
VCC [Power]: D6.A Q4.3
VCC1 [Power]: D13.A Q9.3
VCC2 [Power]: D23.A Q14.3
VCC3 [Power]: D33.A Q19.3
VCC4 [Power]: D43.A Q24.3
VCC5 [Power]: D53.A Q29.3
VCC_IN [Power]: J2.72 J2.74 Q4.2 R11.2
VCC_IN1 [Power]: J9.72 J9.74 Q9.2 R21.2
VCC_IN2 [Power]: J14.72 J14.74 Q14.2 R37.2
VCC_IN3 [Power]: J19.72 J19.74 Q19.2 R53.2
VCC_IN4 [Power]: J24.72 J24.74 Q24.2 R69.2
VCC_IN5 [Power]: J29.72 J29.74 Q29.2 R85.2
VIN [Power]: C3.+ C4.+ C5.1 C6.1 D2.A J6.70 J6.72 J6.74 R12.2 R13.2 R16.2 U2.1
VIN1 [Power]: C12.+ C13.+ C15.1 C17.1 D15.A J8.70 J8.72 J8.74 R27.2 R28.2 R31.2 U4.1
VIN2 [Power]: C22.+ C23.+ C25.1 C27.1 D25.A J13.70 J13.72 J13.74 R43.2 R44.2 R47.2 U6.1
VIN3 [Power]: C32.+ C33.+ C35.1 C37.1 D35.A J18.70 J18.72 J18.74 R59.2 R60.2 R63.2 U8.1
VIN4 [Power]: C42.+ C43.+ C45.1 C47.1 D45.A J23.70 J23.72 J23.74 R75.2 R76.2 R79.2 U10.1
VIN5 [Power]: C52.+ C53.+ C55.1 C57.1 D55.A J28.70 J28.72 J28.74 R91.2 R92.2 R95.2 U12.1

## Tracks (layer width: path | path; a pad name or v marks a point on that pad's centre or on a via)
3.3V  (via drill 0.3)  (1 unrouted)